# Altium PCB ShareBoard-i.MXRT1050_REV4.PcbDoc (part 1 of 3)
Units mil, origin at the board's own origin, x right, y up, seen from the top; angles counter-clockwise.
Board outline 1968.5 x 1968.5 mil, 4 copper layers (Top Layer, GND, POWER, Bottom Layer), stack 30.635 mil thick; 194 components, 200 nets, 998 pads, 472 vias.
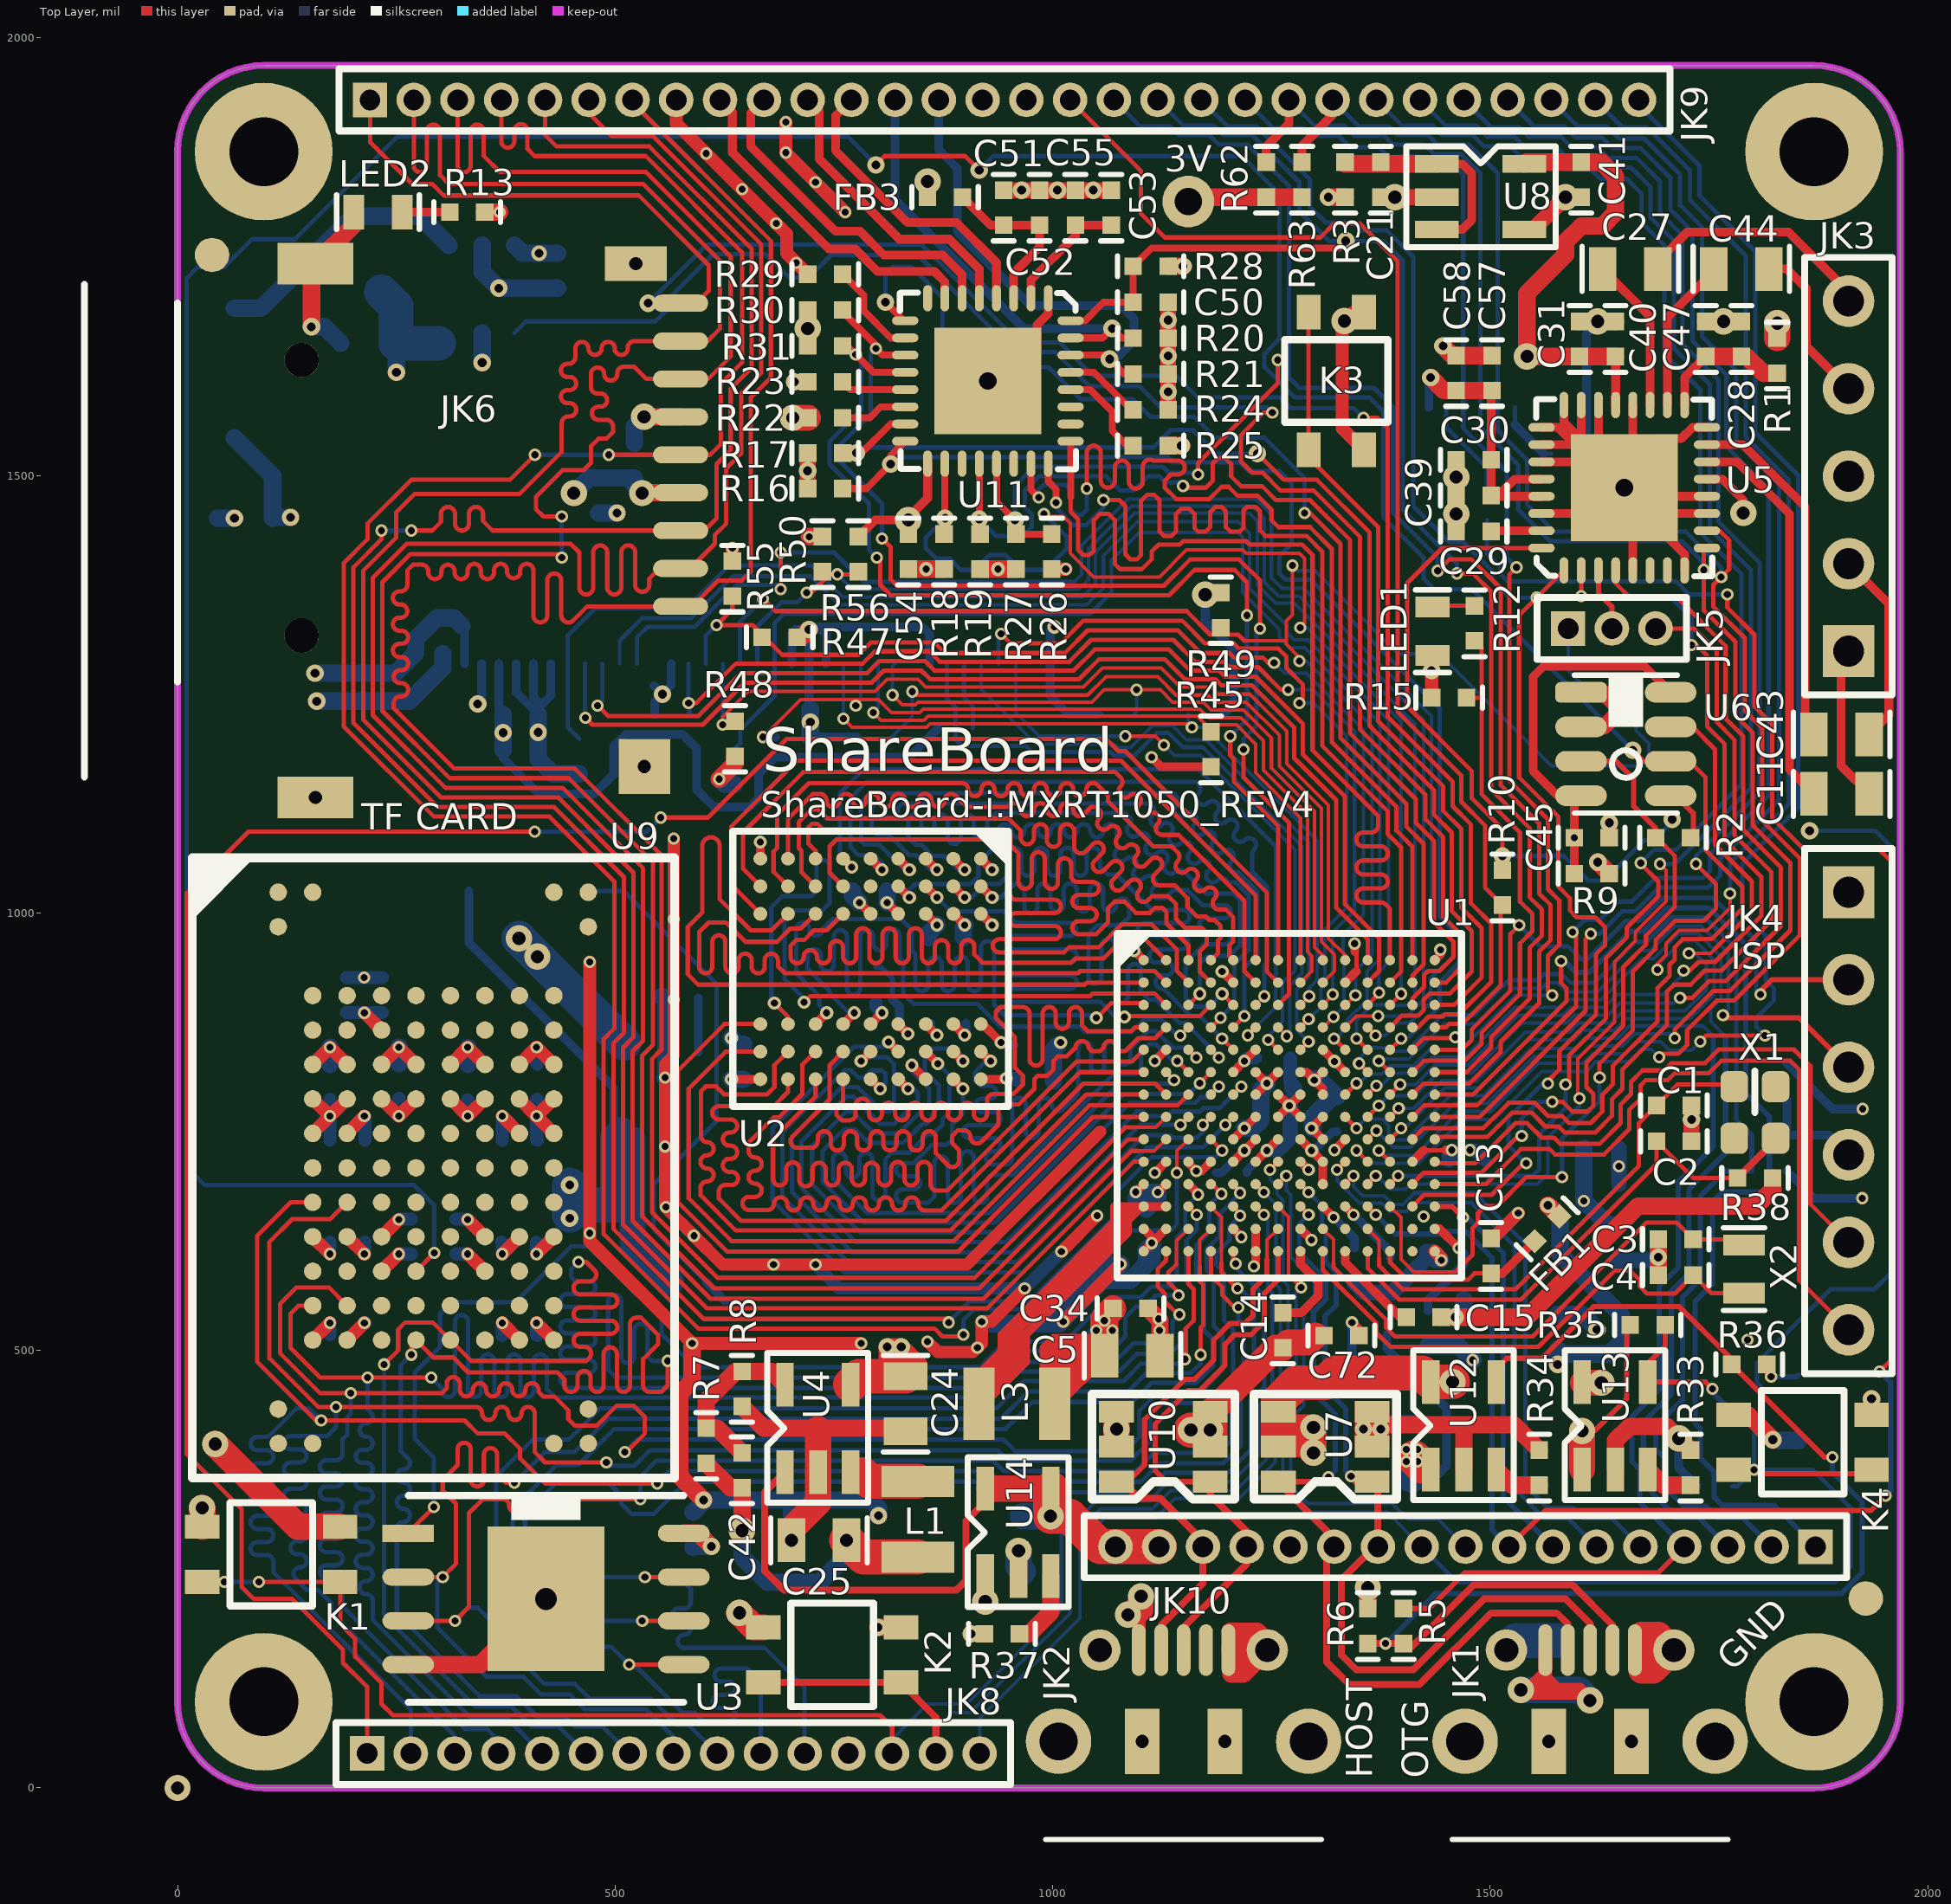
[diagram p0: Top Layer view]
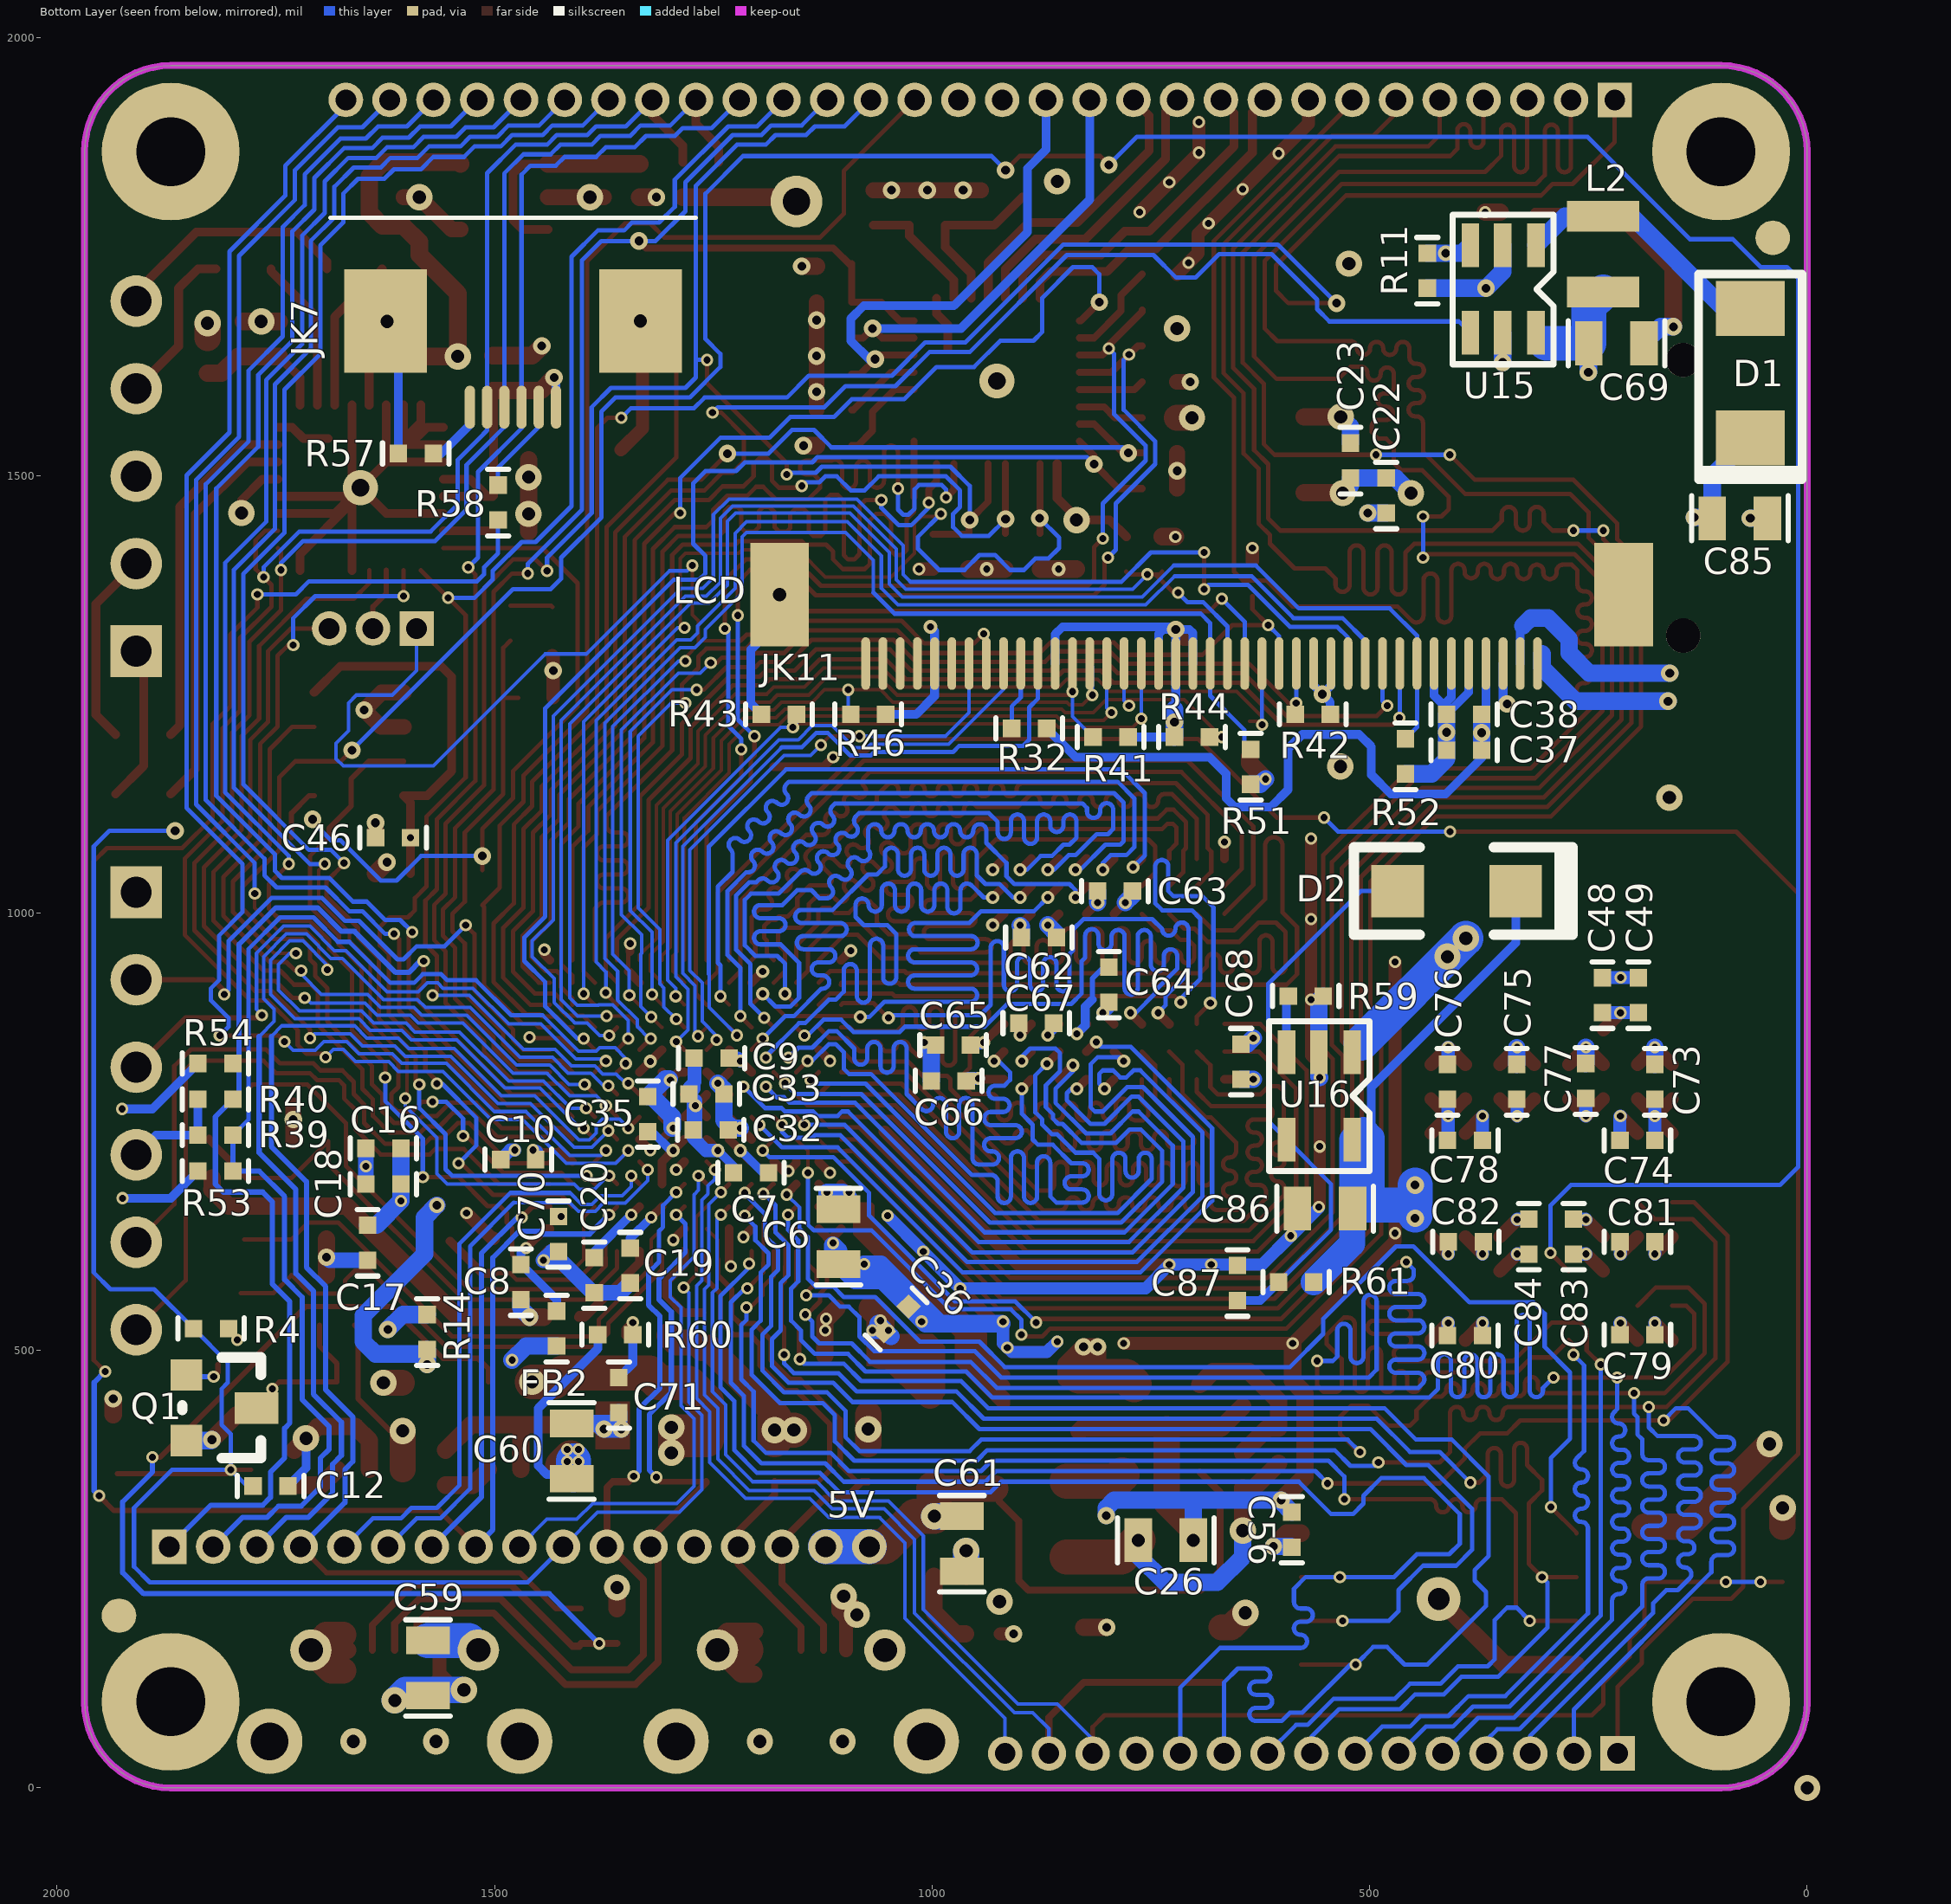
[diagram p1: Bottom Layer view, seen from below]
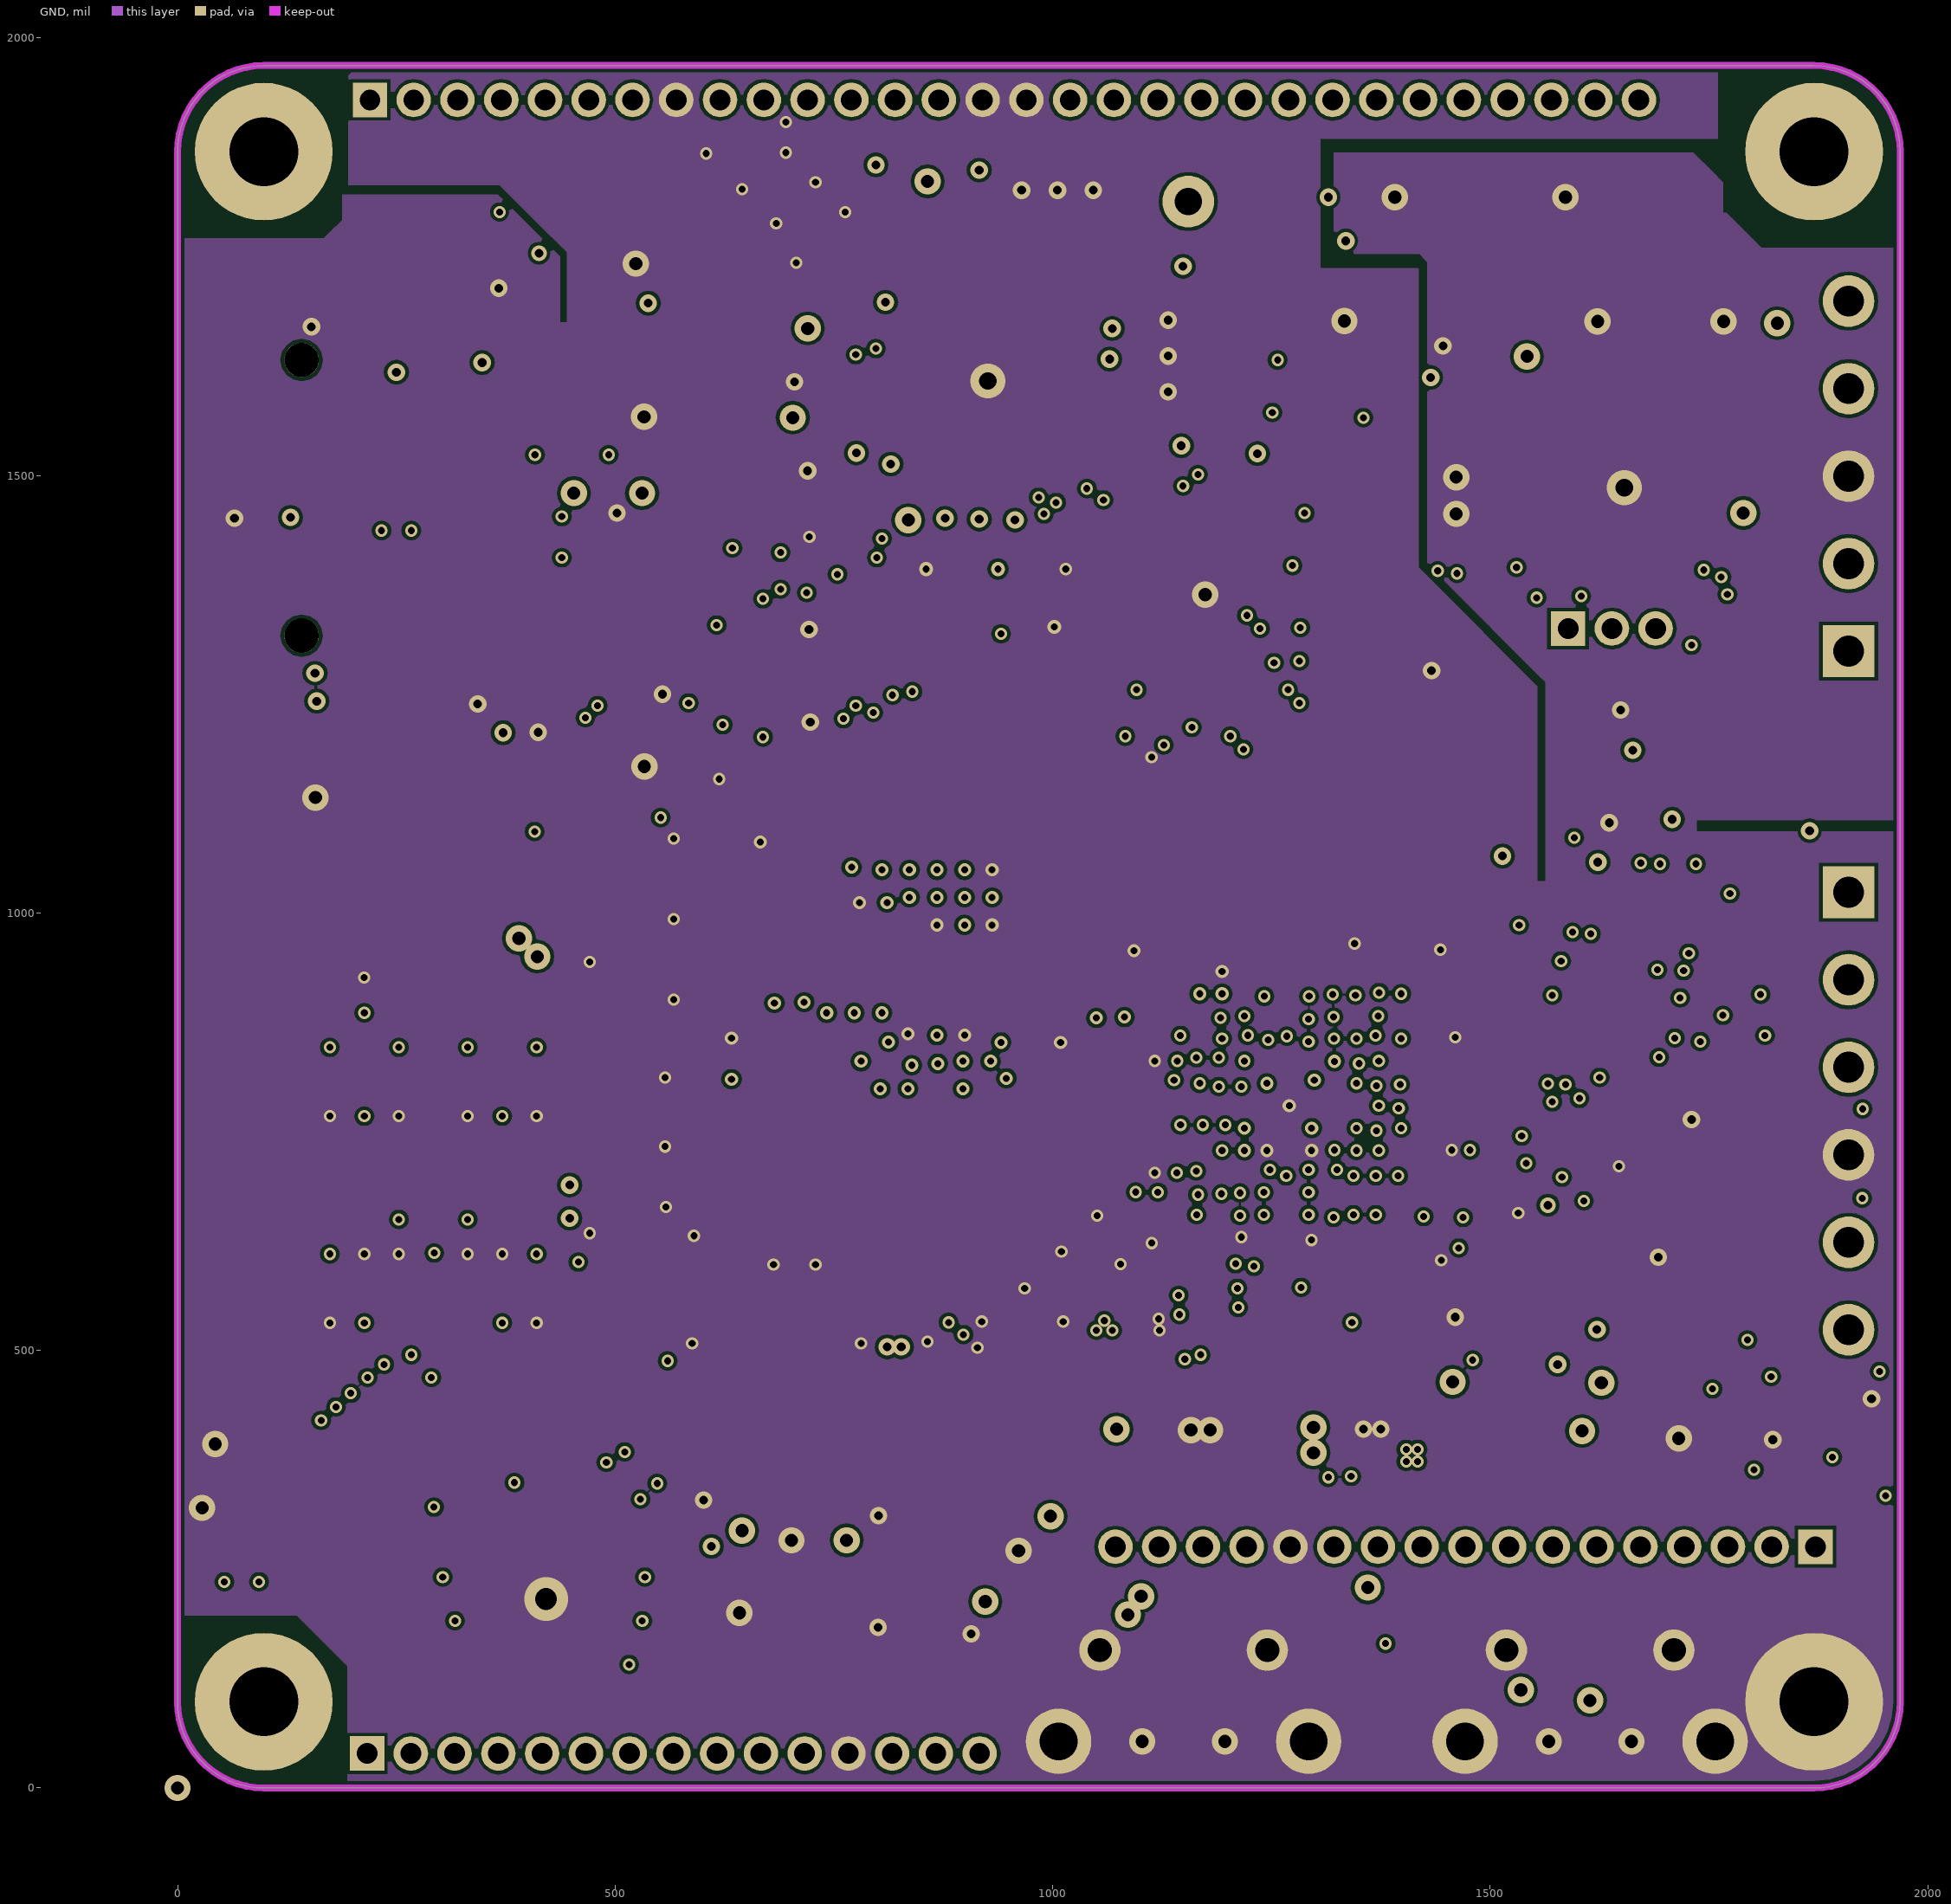
[diagram p2: GND]
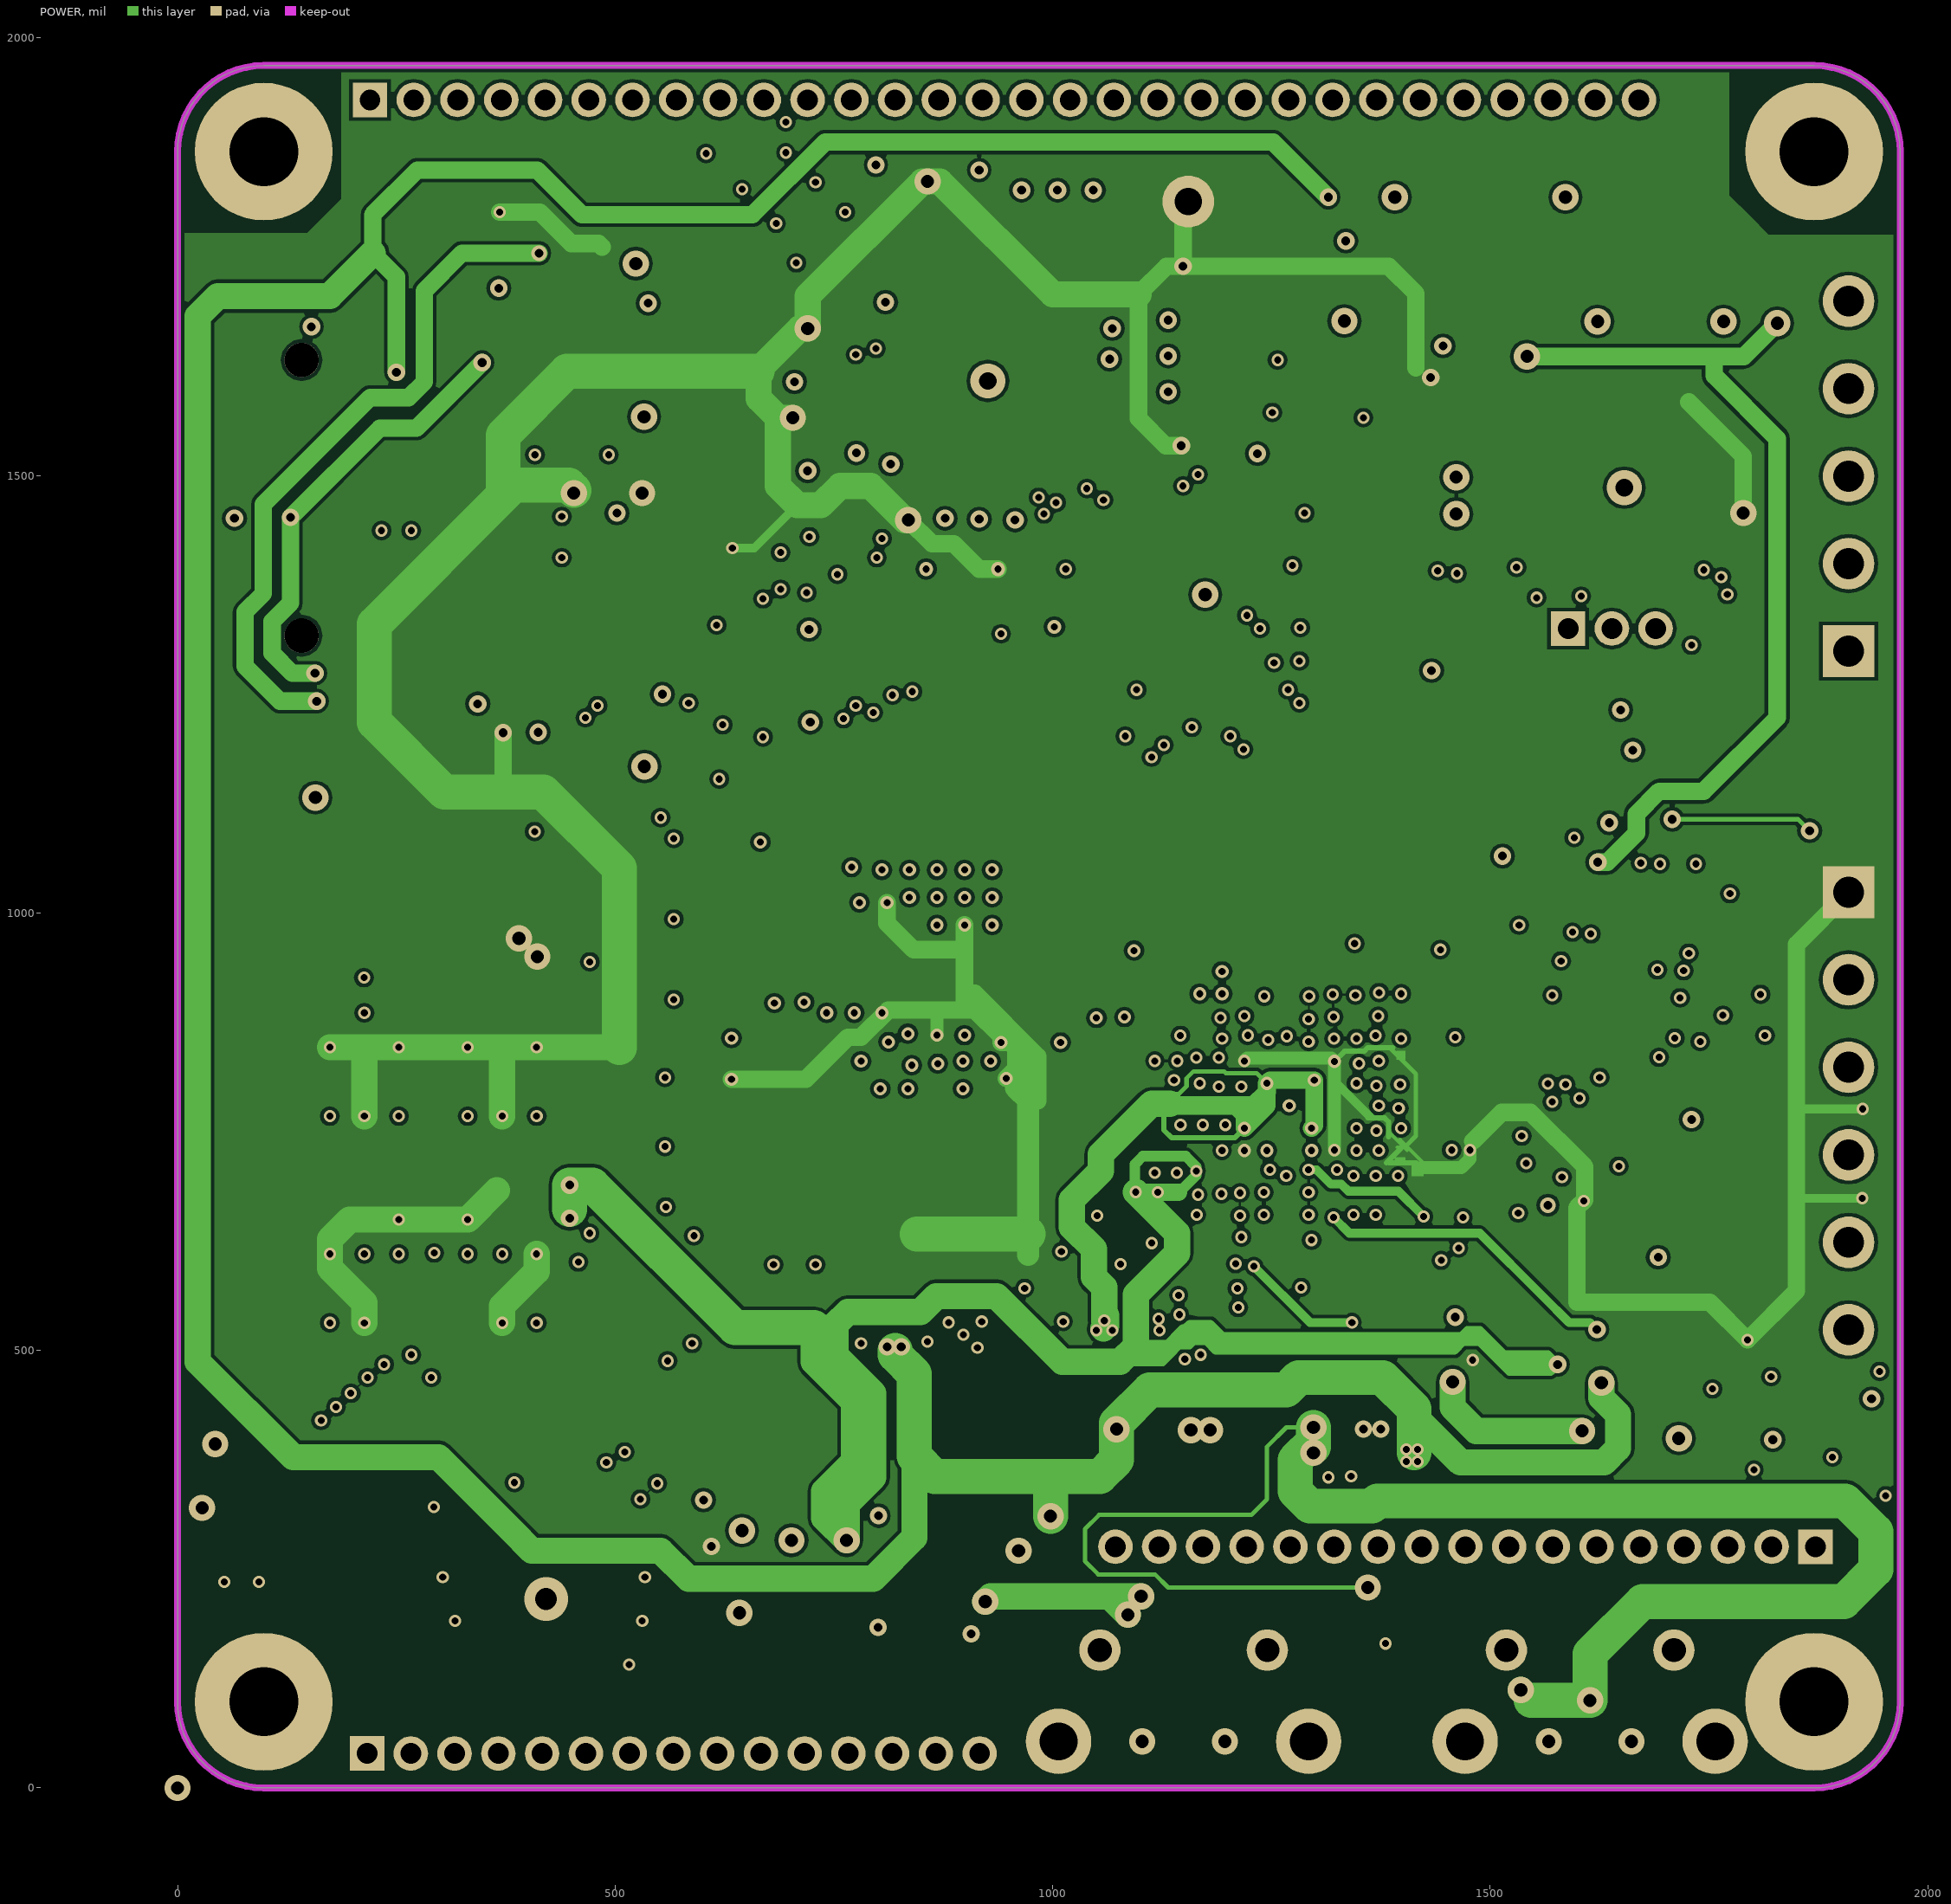
[diagram p3: POWER]

## Layer stack, top to bottom
Top Solder: solder mask 0.4, Solder Resist, Dk 3.5
Top Layer: signal copper 1.4
Dielectric 1: core 10, FR-4, Dk 4.2
GND: signal copper 1.4173
Dielectric 3: prepreg 5, Dk 4.2
POWER: signal copper 1.4173
Dielectric 2: core 10, Dk 4.2
Bottom Layer: signal copper 1.4
Bottom Solder: solder mask 0.4, Solder Resist, Dk 3.5

## Board outline
98.43,0 cw(c98.43,98.43) 0,98.43 0,1870.08 cw(c98.43,1870.08) 98.43,1968.5 1870.08,1968.5 cw(c1870.08,1870.08) 1968.5,1870.08 1968.5,98.43 cw(c1870.08,98.43) 1870.08,0

## Design rules (kind name [scope] priority, off if disabled: settings)
Clearance Polygon [InPolygon] p1: gap=4
Clearance [All] p2: gap=4
PolygonConnect [All] p1: connectstyle=Direct reliefconductorwidth=10 reliefentries=4 polygonreliefangle="90 Angle" airgapwidth=10
RoutingVias [All] p1: holewidth=28 width=50 viastyle="Through Hole" minholewidth=3 minwidth=6 maxholewidth=28 maxwidth=50
SolderMaskExpansion [All] p1: expansion=2
Width [All] p1: maxlimit=100 minlimit=2.6 preferedwidth=10
29 further rules are at their usual default settings.

## Components (designator, comment, footprint, x,y, rotation, side; value= is the part's Value field where it differs from the comment)
C1 "18pF" 402 1710,780 r0 top locked
C2 "18pF" 402 1710,739 r0 top locked
C3 "18pF" 402 1712,627 r180 top locked
C4 "18pF" 402 1712,586 r180 top locked
C5 "47uF/X5R/10V" 805 1091,494 r180 top locked
C6 "47uF/X5R/10V" 805 1107,630 r90 bottom locked
C7 "0.1uF/X7R/16V" 402 1207,703 r0 bottom locked
C8 "10uF/10V/X5R" 402 1470,578 r270 bottom locked
C9 "10uF/10V/X5R" 402 1252,834 r180 bottom locked
C10 "0.1uF/X7R/16V" 402 1473,718 r0 bottom locked
C11 "47uF/X5R/10V" 805 1901.5,1136 r0 top locked
C12 "1uF/16V/X7R" 402 1756,345 r180 bottom locked
C13 "10uF/10V/X5R" 402 1501,608 r90 top locked
C14 "10uF/10V/X5R" 402 1263,523 r270 top locked
C15 "10uF/10V/X5R" 402 1424,538 r0 top locked
C16 "10uF/10V/X5R" 402 1627,731 r0 bottom locked
C17 "0.1uF/X7R/16V" 402 1645,623 r90 bottom locked
C18 "0.1uF/X7R/16V" 402 1627,690 r180 bottom locked
C19 "1uF/16V/X7R" 402 1345,597 r90 bottom locked
C20 "1uF/16V/X7R" 402 1386,586 r90 bottom locked
C21 "10uF/10V/X5R" 402 1375,1838 r270 top locked
C22 "10uF/10V/X5R" 402 481,1477 r270 bottom locked
C23 "0.1uF/X7R/16V" 402 522,1517 r90 bottom locked
C24 "47uF/X5R/10V" 805 832,439 r90 top locked
C25 "47uF/X5R/10V" 805 733,283 r0 top locked
C26 "47uF/X5R/10V" 805 733,283 r0 bottom locked
C27 "47uF/X5R/10V" 805 1660,1736 r0 top locked
C28 "10uF/10V/X5R" 402 1787.16,1656 r90 top locked
C29 "1uF/16V/X7R" 402 1481.16,1436 r180 top locked
C30 "10uF/10V/X5R" 402 1481.16,1518 r0 top locked
C31 "10uF/10V/X5R" 402 1602.16,1656 r90 top locked
C32 "0.1uF/X7R/16V" 402 1253,752 r180 bottom locked
C33 "0.1uF/X7R/16V" 402 1258,793 r180 bottom locked
C34 "0.1uF/X7R/16V" 402 1089,548 r180 top locked
C35 "0.1uF/X7R/16V" 402 1325,770 r90 bottom locked
C36 "10uF/10V/X5R" 402 1041,536 r315 bottom locked
C37 "10uF/10V/X5R" 402 392,1186 r0 bottom locked
C38 "0.1uF/X7R/16V" 402 392,1227 r180 bottom locked
C39 "0.1uF/X7R/16V" 402 1481.16,1477 r180 top locked
C40 "0.1uF/X7R/16V" 402 1643.16,1656 r270 top locked
C41 "10uF/10V/X5R" 402 1604,1838 r270 top locked
C42 "10pF/NP0" 402 645,363 r270 top locked
C43 "47uF/X5R/10V" 805 1901.5,1204 r0 top locked
C44 "47uF/X5R/10V" 805 1787,1736 r0 top locked
C45 "0.1uF/X7R/16V" 402 1616,1086 r0 top locked
C46 "10uF/10V/X5R" 402 1616,1086 r0 bottom locked
C47 "0.1uF/X7R/16V" 402 1746.16,1656 r90 top locked
C48 "10uF/10V/X5R" 402 233.95,906 r90 bottom locked
C49 "0.1uF/X7R/16V" 402 192.95,906 r90 bottom locked
C50 "0.1uF/X7R/16V" 402 1112,1698 r0 top locked
C51 "10uF/10V/X5R" 402 944,1806 r270 top locked
C52 "0.1uF/X7R/16V" 402 985,1806 r270 top locked
C53 "10uF/10V/X5R" 402 1067,1806 r90 top locked
C54 "0.1uF/X7R/16V" 402 835,1413 r270 top locked
C55 "0.1uF/X7R/16V" 402 1026,1806 r90 top locked
C56 "0.1uF/X7R/16V" 402 589,295 r90 bottom locked
C57 "10uF/10V/X5R" 402 1502,1617 r90 top locked
C58 "0.1uF/X7R/16V" 402 1461,1617 r270 top locked
C59 "47uF/X5R/10V" 805 1576,137 r270 bottom locked
C60 "47uF/X5R/10V" 805 1412,385 r270 bottom locked
C61 "47uF/X5R/10V" 805 966,279 r270 bottom locked
C62 "0.1uF/X7R/16V" 402 878,972 r0 bottom locked
C63 "0.1uF/X7R/16V" 402 791,1025 r0 bottom locked
C64 "0.1uF/X7R/16V" 402 798,918 r270 bottom locked
C65 "0.1uF/X7R/16V" 402 976,849 r180 bottom locked
C66 "0.1uF/X7R/16V" 402 981,808 r180 bottom locked
C67 "0.1uF/X7R/16V" 402 881,874 r180 bottom locked
C68 "0.1uF/X7R/16V" 402 647,830 r270 bottom locked
C69 "47uF/X5R/10V" 805 218,1651 r0 bottom locked
C70 "10uF/10V/X5R" 402 1427,633 r90 bottom locked
C71 "10uF/10V/X5R" 402 1358,449 r270 bottom locked
C72 "0.1uF/X7R/16V" 402 1330,517 r0 top locked
C73 "0.1uF/X7R/16V" 402 174,807 r270 bottom locked
C74 "0.1uF/X7R/16V" 402 253,808 r270 bottom locked
C75 "0.1uF/X7R/16V" 402 332,807 r90 bottom locked
C76 "0.1uF/X7R/16V" 402 411,807 r90 bottom locked
C77 "0.1uF/X7R/16V" 402 194,740 r0 bottom locked
C78 "0.1uF/X7R/16V" 402 391,740 r180 bottom locked
C79 "0.1uF/X7R/16V" 402 194,518 r180 bottom locked
C80 "0.1uF/X7R/16V" 402 391,517 r180 bottom locked
C81 "0.1uF/X7R/16V" 402 194,624 r180 bottom locked
C82 "0.1uF/X7R/16V" 402 390,624 r0 bottom locked
C83 "0.1uF/X7R/16V" 402 267,630 r90 bottom locked
C84 "0.1uF/X7R/16V" 402 318,630 r90 bottom locked
C85 "47uF/X5R/10V" 805 77,1451 r0 bottom locked
C86 "47uF/X5R/10V" 805 551,662 r0 bottom locked
C87 "1uF/16V/X7R" 402 651,577 r90 bottom locked
D1 "SS14" SMA 65,1690 r0 bottom locked
D2 "1N4148T/空焊" 1N4148T 468,1025 r180 bottom locked
FB1 "0" 402 1565,639 r45 top locked
FB2 "300" 402 1429,525 r270 bottom locked
FB3 "300" 402 877,1818 r180 top locked
JK1 "OTG" "MICRO USB DIP" 1614.17,157.48 r180 top locked
JK2 "HOST" "MICRO USB DIP" 1149.61,157.48 r180 top locked
JK3 "AOUT" HDR1X5 1909.45,1299.21 r90 top locked
JK4 "ISP" HDR1X6 1909.45,1023.62 r270 top locked
JK5 "I2S" MHDR1X3 1589,1325 r0 top locked
JK6 "TF CARD" "TF CARD-H" 141.73,1437.01 r270 top locked
JK7 "TP" FPC6-0.5 1479,1578 r0 bottom locked
JK8 "E_IO2" MHDR1X15 216.54,39.37 r0 top locked
JK9 "E_IO1" MHDR1X30 944.88,1929.13 r0 top locked
JK10 "E_IO3" MHDR1X17 1871.65,275.59 r180 top locked
JK11 "LCD" FPC40-0.5 692,1285 r180 bottom locked
K1 "O" 3X3.5X1.8轻触开关 107,267 r180 top locked
K2 "+" 3X3.5X1.8轻触开关 748,152 r180 top locked
K3 "-" 3X3.5X1.8轻触开关 1324,1608 r90 top locked
K4 "KEY_RESET" 3X3.5X1.8轻触开关 1857,395 r180 top locked
L1 "SPH252012H2R2MT" 电感2520 846,307 r270 top locked
L2 "SPH252012H100MT" 电感2520 233,1753 r90 bottom locked
L3 "SPH252012H4R7MT" 电感2520 959,439 r0 top locked
LED1 "LED1" 603 1434,1322 r270 top locked
LED2 "POWER ON" 603 229,1801 r180 top locked
Q1 "SS9014" SOT-23 1852,472 r270 bottom locked
R1 "10" 402 1828,1637 r90 top locked
R2 "0" 402 1709,1086 r0 top locked
R3 "10" 402 1334,1838 r90 top locked
R4 "47K" 402 1824,525 r180 bottom locked
R5 "0/For NXP EVK" 402 1401,185 r270 top locked
R6 "10K" 402 1360,185 r90 top locked
R7 "249K" 402 604,391 r90 top locked
R8 "62K" 402 645,456 r270 top locked
R9 "10" 402 1616,1045 r0 top locked
R10 "0" 402 1514,1029 r270 top locked
R11 "10" 402 434,1734 r90 bottom locked
R12 "820" 402 1482,1331 r270 top locked
R13 "820" 402 331,1801 r0 top locked
R14 "0" 402 1577,521 r270 bottom locked
R15 "10K" 402 1453,1246 r0 top locked
R16 "1K" 402 740,1485 r0 top locked
R17 "1K" 402 740.09,1525.68 r0 top locked
R18 "1K" 402 876,1413 r90 top locked
R19 "4.7K" 402 917,1413 r90 top locked
R20 "1K" 402 1112,1657 r0 top locked
R21 "1K" 402 1112,1616 r0 top locked
R22 "4.7K" 402 740,1566 r0 top locked
R23 "1K" 402 740,1607 r0 top locked
R24 "1K" 402 1112,1575 r0 top locked
R25 "4.7K" 402 1112,1534 r0 top locked
R26 "1K" 402 999,1413 r90 top locked
R27 "1K" 402 958,1413 r90 top locked
R28 "10K" 402 1112,1739 r180 top locked
R29 "6.49K" 402 740,1730 r0 top locked
R30 "1K" 402 740,1689 r0 top locked
R31 "1K" 402 740,1648 r0 top locked
R32 "10K" 402 889,1211 r180 bottom locked
R33 "6.8K for 1A" 402 1729,366 r90 top locked
R34 "6.8K for 1A" 402 1556,366 r90 top locked
R35 "10K" 402 1680,529 r180 top locked
R36 "10K" 402 1796,484 r180 top locked
R37 "10K" 402 942,176 r180 top locked
R38 "2.2M" 402 1802.56,697 r0 top locked
R39 "10K" 402 1819,746 r0 bottom locked
R40 "空焊" 402 1819,787 r0 bottom locked
R41 "10K" 402 796,1201 r0 bottom locked
R42 "10K" 402 565,1227 r0 bottom locked
R43 "10K" 402 1175,1227 r180 bottom locked
R44 "10K" 402 703,1201 r180 bottom locked
R45 "10K" 402 1181,1187 r90 top locked
R46 "10K" 402 1073,1227 r0 bottom locked
R47 "10K" 402 688,1315 r180 top locked
R48 "10K" 402 637,1199 r90 top locked
R49 "10K" 402 1192,1346 r270 top locked
R50 "10K" 402 737,1410 r270 top locked
R51 "10K" 402 636,1167 r90 bottom locked
R52 "10K" 402 459,1179 r90 bottom locked
R53 "空焊" 402 1819,705 r0 bottom locked
R54 "10K" 402 1819,828 r0 bottom locked
R55 "空焊" 402 634,1382 r90 top locked
R56 "空焊" 402 778,1410 r90 top locked
R57 "0" 402 1590,1525 r0 bottom locked
R58 "0" 402 1496,1469 r270 bottom locked
R59 "10K" 402 573,905 r180 bottom locked
R60 "10" 402 1362,518 r180 bottom locked
R61 "47K" 402 584,578 r0 bottom locked
R62 "4.7K" 402 1244,1838 r90 top locked
R63 "4.7K" 402 1285,1838 r90 top locked
U1 "RT1052" MAPBGA196-10x10-0.65 1104,946 r0 top locked
U2 "W9825G6JB-6" TFBGA54 792,936 r270 top locked
U3 "25Q256FVEIM" WSON8-6X8 421,216 r0 top locked
U4 "RT8059" SOT-23-5 694,361 r0 top locked
U5 "AK4452" QFN32-5x5-0.5 1653.16,1486 r90 top locked
U6 "MSM26S4030H0" LGA8-4X3-1 1655,1193 r0 top locked
U7 "NUP2114U" TSOP-6 1365,350 r90 top locked
U8 "LP5907MF-3.3" SOT-23-5 1439,1856 r270 top locked
U9 "EMMC" LBGA100-1.0 115,1023.62 r0 top locked
U10 "NUP2114U" TSOP-6 1180,350 r90 top locked
U11 "KSZ8081RNB" QFN32-5x5-0.5 926,1608 r270 top locked
U12 "MT9700" SOT-23-5 1432,364 r0 top locked
U13 "MT9700" SOT-23-5 1605,364 r0 top locked
U14 "MT9700" SOT-23-5 923,242 r0 top locked
U15 "SGM3732" SOT-23-6 310,1763 r0 bottom locked
U16 "MT9700" SOT-23-5 520,841 r0 bottom locked
X1 "24MHz" CY2016 1802.56,772 r270 top locked
X2 "32.768KHz" CY2012 1790,593 r270 top locked

## Footprints (in the part's own frame and the unit in brackets; to place one, negate y for a bottom-side part, rotate by r counter-clockwise, add the part's x,y. Pads: shape width x height; smd on the part's side, far side on the other; paste and mask are expansions set on the pad)
1N4148T [mil]
  rect 60x60 smd: 1(0,0) 2(135,0)
  silkscreen extent -50,-50 200,50
3X3.5X1.8轻触开关 [mm]
  rect 1x0.7 smd: 1(-2,-0.8) 2(2,0.8) 3(2,-0.8) 4(-2,0.8)
  silkscreen extent -1.2,-1.5 1.2,1.5
402 [mil]
  rect 20x20 smd: 1(-20,0) 2(20,0)
  silkscreen extent -38,-12 38,12
603 [mm]
  rect 0.6x1 smd: 1(-0.7,0) 2(0.7,0)
  silkscreen extent -1.2,-0.5 1.2,0.5
805 [mm]
  rect 0.8x1.27 smd: 1(-0.8,0) 2(0.8,0)
  silkscreen extent -1.4,-0.65 1.4,0.65
CY2012 [mm]
  rect 0.6x1.2 smd: 1(-0.7,0) 2(0.7,0)
  silkscreen extent -1.2,-0.6 1.2,0.6
CY2016 [mm] "CRYSTAL"
  rrect50% 0.9x0.8 smd: 0(-0.75,0.6) 0(0.75,-0.6) 1(-0.75,-0.6) 2(0.75,0.6)
  silkscreen extent -1.2,0 0,0
FPC6-0.5 [mm]
  rect 2.4x3 smd: 0(-3.7,-2.5) 0(3.7,-2.5)
  oval 0.3x1.25 smd: 1(-1.25,0) 2(-0.75,0) 3(-0.25,0) 4(0.25,0) 5(0.75,0) 6(1.25,0)
  silkscreen extent -5.3,-5.5 5.3,-5.5
FPC40-0.5 [mil]
  oval 10x60 smd: 1(-383.86,0) 2(-364.17,0) 3(-344.49,0) 4(-324.8,0) 5(-305.12,0) 6(-285.43,0) 7(-265.75,0) 8(-246.06,0) 9(-226.38,0) 10(-206.69,0) 11(-187.01,0) 12(-167.32,0) 13(-147.64,0) 14(-127.95,0) 15(-108.27,0) 16(-88.58,0) 17(-68.9,0) 18(-49.21,0) 19(-29.53,0) 20(-9.84,0) 21(9.84,0) 22(29.53,0) 23(49.21,0) 24(68.9,0) 25(88.58,0) 26(108.27,0) 27(127.95,0) 28(147.64,0) 29(167.32,0) 30(187.01,0) 31(206.69,0) 32(226.38,0) 33(246.06,0) 34(265.75,0) 35(285.43,0) 36(305.12,0) 37(324.8,0) 38(344.49,0) 39(364.17,0) 40(383.86,0)
  rect 66.93x118.11 smd: ""(-482.28,78.74) ""(482.28,78.74)
HDR1X5 [mm] "Connector; Header; 5 Position"
  rect 1.5x1.5 hole 0.9: 1(0,0)
  round 1.5 hole 0.9: 2(2.54,0) 3(5.08,0) 4(7.62,0) 5(10.16,0)
  silkscreen extent -1.27,-1.27 11.43,1.27
HDR1X6 [mm] "Connector; Header; 6 Position"
  rect 1.5x1.5 hole 0.9: 1(0,0)
  round 1.5 hole 0.9: 2(2.54,0) 3(5.08,0) 4(7.62,0) 5(10.16,0) 6(12.7,0)
  silkscreen extent -1.27,-1.27 13.97,1.27
LBGA100-1.0 [mil]
  round 20 smd: A1(0,0) A2(39.37,0) A9(314.96,0) A10(354.33,0) B1(0,-39.37) B10(354.33,-39.37) D2(39.37,-118.11) D3(78.74,-118.11) D4(118.11,-118.11) D5(157.48,-118.11) D6(196.85,-118.11) D7(236.22,-118.11) D8(275.59,-118.11) D9(314.96,-118.11) E2(39.37,-157.48) E3(78.74,-157.48) E4(118.11,-157.48) E5(157.48,-157.48) E6(196.85,-157.48) E7(236.22,-157.48) E8(275.59,-157.48) E9(314.96,-157.48) F2(39.37,-196.85) F3(78.74,-196.85) F4(118.11,-196.85) F5(157.48,-196.85) F6(196.85,-196.85) F7(236.22,-196.85) F8(275.59,-196.85) F9(314.96,-196.85) G2(39.37,-236.22) G3(78.74,-236.22) G4(118.11,-236.22) G5(157.48,-236.22) G6(196.85,-236.22) G7(236.22,-236.22) G8(275.59,-236.22) G9(314.96,-236.22) H2(39.37,-275.59) H3(78.74,-275.59) H4(118.11,-275.59) H5(157.48,-275.59) H6(196.85,-275.59) H7(236.22,-275.59) H8(275.59,-275.59) H9(314.96,-275.59) J2(39.37,-314.96) J3(78.74,-314.96) J4(118.11,-314.96) J5(157.48,-314.96) J6(196.85,-314.96) J7(236.22,-314.96) J8(275.59,-314.96) J9(314.96,-314.96) K2(39.37,-354.33) K3(78.74,-354.33) K4(118.11,-354.33) K5(157.48,-354.33) K6(196.85,-354.33) K7(236.22,-354.33) K8(275.59,-354.33) K9(314.96,-354.33) L2(39.37,-393.7) L3(78.74,-393.7) L4(118.11,-393.7) L5(157.48,-393.7) L6(196.85,-393.7) L7(236.22,-393.7) L8(275.59,-393.7) L9(314.96,-393.7) M2(39.37,-433.07) M3(78.74,-433.07) M4(118.11,-433.07) M5(157.48,-433.07) M6(196.85,-433.07) M7(236.22,-433.07) M8(275.59,-433.07) M9(314.96,-433.07) N2(39.37,-472.44) N3(78.74,-472.44) N4(118.11,-472.44) N5(157.48,-472.44) N6(196.85,-472.44) N7(236.22,-472.44) N8(275.59,-472.44) N9(314.96,-472.44) P2(39.37,-511.81) P3(78.74,-511.81) P4(118.11,-511.81) P5(157.48,-511.81) P6(196.85,-511.81) P7(236.22,-511.81) P8(275.59,-511.81) P9(314.96,-511.81) T1(0,-590.55) T10(354.33,-590.55) U1(0,-629.92) U2(39.37,-629.92) U9(314.96,-629.92) U10(354.33,-629.92)
  silkscreen extent -102,-669 453,41
LGA8-4X3-1 [mm]
  rrect50% 1.5x0.6 smd: 1(-1.3,1.5)
  oval 1.5x0.6 smd: 2(-1.3,0.5) 3(-1.3,-0.5) 4(-1.3,-1.5) 5(1.3,-1.5) 6(1.3,-0.5) 7(1.3,0.5) 8(1.3,1.5)
  silkscreen extent -1.5,-2 1.5,2
MAPBGA196-10x10-0.65 [mm]
  round 0.3 smd: A1(0,0) A2(0.65,0) A3(1.3,0) A4(1.95,0) A5(2.6,0) A6(3.25,0) A7(3.9,0) A8(4.55,0) A9(5.2,0) A10(5.85,0) A11(6.5,0) A12(7.15,0) A13(7.8,0) A14(8.45,0) B1(0,-0.65) B2(0.65,-0.65) B3(1.3,-0.65) B4(1.95,-0.65) B5(2.6,-0.65) B6(3.25,-0.65) B7(3.9,-0.65) B8(4.55,-0.65) B9(5.2,-0.65) B10(5.85,-0.65) B11(6.5,-0.65) B12(7.15,-0.65) B13(7.8,-0.65) B14(8.45,-0.65) C1(0,-1.3) C2(0.65,-1.3) C3(1.3,-1.3) C4(1.95,-1.3) C5(2.6,-1.3) C6(3.25,-1.3) C7(3.9,-1.3) C8(4.55,-1.3) C9(5.2,-1.3) C10(5.85,-1.3) C11(6.5,-1.3) C12(7.15,-1.3) C13(7.8,-1.3) C14(8.45,-1.3) D1(0,-1.95) D2(0.65,-1.95) D3(1.3,-1.95) D4(1.95,-1.95) D5(2.6,-1.95) D6(3.25,-1.95) D7(3.9,-1.95) D8(4.55,-1.95) D9(5.2,-1.95) D10(5.85,-1.95) D11(6.5,-1.95) D12(7.15,-1.95) D13(7.8,-1.95) D14(8.45,-1.95) E1(0,-2.6) E2(0.65,-2.6) E3(1.3,-2.6) E4(1.95,-2.6) E5(2.6,-2.6) E6(3.25,-2.6) E7(3.9,-2.6) E8(4.55,-2.6) E9(5.2,-2.6) E10(5.85,-2.6) E11(6.5,-2.6) E12(7.15,-2.6) E13(7.8,-2.6) E14(8.45,-2.6) F1(0,-3.25) F2(0.65,-3.25) F3(1.3,-3.25) F4(1.95,-3.25) F5(2.6,-3.25) F6(3.25,-3.25) F7(3.9,-3.25) F8(4.55,-3.25) F9(5.2,-3.25) F10(5.85,-3.25) F11(6.5,-3.25) F12(7.15,-3.25) F13(7.8,-3.25) F14(8.45,-3.25) G1(0,-3.9) G2(0.65,-3.9) G3(1.3,-3.9) G4(1.95,-3.9) G5(2.6,-3.9) G6(3.25,-3.9) G7(3.9,-3.9) G8(4.55,-3.9) G9(5.2,-3.9) G10(5.85,-3.9) G11(6.5,-3.9) G12(7.15,-3.9) G13(7.8,-3.9) G14(8.45,-3.9) H1(0,-4.55) H2(0.65,-4.55) H3(1.3,-4.55) H4(1.95,-4.55) H5(2.6,-4.55) H6(3.25,-4.55) H7(3.9,-4.55) H8(4.55,-4.55) H9(5.2,-4.55) H10(5.85,-4.55) H11(6.5,-4.55) H12(7.15,-4.55) H13(7.8,-4.55) H14(8.45,-4.55) J1(0,-5.2) J2(0.65,-5.2) J3(1.3,-5.2) J4(1.95,-5.2) J5(2.6,-5.2) J6(3.25,-5.2) J7(3.9,-5.2) J8(4.55,-5.2) J9(5.2,-5.2) J10(5.85,-5.2) J11(6.5,-5.2) J12(7.15,-5.2) J13(7.8,-5.2) J14(8.45,-5.2) K1(0,-5.85) K2(0.65,-5.85) K3(1.3,-5.85) K4(1.95,-5.85) K5(2.6,-5.85) K6(3.25,-5.85) K7(3.9,-5.85) K8(4.55,-5.85) K9(5.2,-5.85) K10(5.85,-5.85) K11(6.5,-5.85) K12(7.15,-5.85) K13(7.8,-5.85) K14(8.45,-5.85) L1(0,-6.5) L2(0.65,-6.5) L3(1.3,-6.5) L4(1.95,-6.5) L5(2.6,-6.5) L6(3.25,-6.5) L7(3.9,-6.5) L8(4.55,-6.5) L9(5.2,-6.5) L10(5.85,-6.5) L11(6.5,-6.5) L12(7.15,-6.5) L13(7.8,-6.5) L14(8.45,-6.5) M1(0,-7.15) M2(0.65,-7.15) M3(1.3,-7.15) M4(1.95,-7.15) M5(2.6,-7.15) M6(3.25,-7.15) M7(3.9,-7.15) M8(4.55,-7.15) M9(5.2,-7.15) M10(5.85,-7.15) M11(6.5,-7.15) M12(7.15,-7.15) M13(7.8,-7.15) M14(8.45,-7.15) N1(0,-7.8) N2(0.65,-7.8) N3(1.3,-7.8) N4(1.95,-7.8) N5(2.6,-7.8) N6(3.25,-7.8) N7(3.9,-7.8) N8(4.55,-7.8) N9(5.2,-7.8) N10(5.85,-7.8) N11(6.5,-7.8) N12(7.15,-7.8) N13(7.8,-7.8) N14(8.45,-7.8) P1(0,-8.45) P2(0.65,-8.45) P3(1.3,-8.45) P4(1.95,-8.45) P5(2.6,-8.45) P6(3.25,-8.45) P7(3.9,-8.45) P8(4.55,-8.45) P9(5.2,-8.45) P10(5.85,-8.45) P11(6.5,-8.45) P12(7.15,-8.45) P13(7.8,-8.45) P14(8.45,-8.45)
  silkscreen extent -0.77,-9.23 9.23,0.78
MHDR1X3 [mm] "Connector; Header; 3 Position"
  rect 1x1 hole 0.6: 1(0,0)
  round 1 hole 0.6: 2(1.27,0) 3(2.54,0)
  silkscreen extent -0.9,-0.9 3.44,0.9
MHDR1X15 [mm] "Connector; Header; 15 Position"
  rect 1x1 hole 0.6: 1(0,0)
  round 1 hole 0.6: 2(1.27,0) 3(2.54,0) 4(3.81,0) 5(5.08,0) 6(6.35,0) 7(7.62,0) 8(8.89,0) 9(10.16,0) 10(11.43,0) 11(12.7,0) 12(13.97,0) 13(15.24,0) 14(16.51,0) 15(17.78,0)
  silkscreen extent -0.9,-0.9 18.68,0.9
MHDR1X17 [mm] "Connector; Header; 17 Position"
  rect 1x1 hole 0.6: 1(0,0)
  round 1 hole 0.6: 2(1.27,0) 3(2.54,0) 4(3.81,0) 5(5.08,0) 6(6.35,0) 7(7.62,0) 8(8.89,0) 9(10.16,0) 10(11.43,0) 11(12.7,0) 12(13.97,0) 13(15.24,0) 14(16.51,0) 15(17.78,0) 16(19.05,0) 17(20.32,0)
  silkscreen extent -0.9,-0.9 21.22,0.9
MHDR1X30 [mm]
  rect 1x1 hole 0.6: 1(-18.415,0)
  round 1 hole 0.6: 2(-17.145,0) 3(-15.875,0) 4(-14.605,0) 5(-13.335,0) 6(-12.065,0) 7(-10.795,0) 8(-9.525,0) 9(-8.255,0) 10(-6.985,0) 11(-5.715,0) 12(-4.445,0) 13(-3.175,0) 14(-1.905,0) 15(-0.635,0) 16(0.635,0) 17(1.905,0) 18(3.175,0) 19(4.445,0) 20(5.715,0) 21(6.985,0) 22(8.255,0) 23(9.525,0) 24(10.795,0) 25(12.065,0) 26(13.335,0) 27(14.605,0) 28(15.875,0) 29(17.145,0) 30(18.415,0)
  silkscreen extent -19.32,-0.9 19.32,0.9
"MICRO USB DIP" [mm]
  round 1.9 hole 1.1: 0(-3.63,2.65) 0(3.63,2.65)
  round 1.2 hole 0.7: 0(-2.43,0) 0(2.43,0)
  rect 1x1.9 smd: 0(-1.2,2.65) 0(1.2,2.65)
  oval 0.4x1.5 smd: 1(1.3,0) 2(0.65,0) 3(0,0) 4(-0.65,0) 5(-1.3,0)
  silkscreen extent -4,5.5 4,5.5
QFN32-5x5-0.5 [mil]
  rect 122.05x122.05 smd: 0(0,0)
  oval 30x10 smd: 1(-94.5,68.92) 2(-94.5,49.23) 3(-94.5,29.53) 4(-94.5,9.85) 5(-94.5,-9.85) 6(-94.5,-29.53) 7(-94.5,-49.22) 8(-94.5,-68.91) 17(94.5,-68.91) 18(94.5,-49.22) 19(94.5,-29.53) 20(94.5,-9.85) 21(94.5,9.85) 22(94.5,29.53) 23(94.5,49.23) 24(94.5,68.91)
  oval 10x30 smd: 9(-68.91,-94.5) 10(-49.23,-94.5) 11(-29.53,-94.5) 12(-9.85,-94.5) 13(9.85,-94.5) 14(29.53,-94.5) 15(49.22,-94.5) 16(68.91,-94.5) 25(68.91,94.5) 26(49.22,94.5) 27(29.53,94.5) 28(9.85,94.5) 29(-9.85,94.5) 30(-29.53,94.5) 31(-49.23,94.5) 32(-68.91,94.5)
  silkscreen extent -101,-100 101,100
SMA [mm]
  rect 2x1.6 smd: 1(0,-0.025) 2(0,3.734)
  silkscreen extent -1.5,-1.02 1.5,5.05
SOT-23 [mil]
  rect 36x36 smd: 1(0,0) 2(75,0)
  rect 36x50 smd: 3(38,80)
  silkscreen extent -20,-5 95,85
SOT-23-5 [mil]
  rect 20x50 smd: 1(0,0) 2(38,0) 3(75,0) 4(75,100) 5(0,100)
  silkscreen extent -20,-35 95,136
SOT-23-6 [mil]
  rect 20x50 smd: 1(0,0) 2(38,0) 3(75,0) 4(75,100) 5(38,100) 6(0,100)
  silkscreen extent -20,-35 95,136
"TF CARD-H" [mm]
  rect 1x1.8 smd: 0(-7.75,9.7)
  rect 1.2x2.2 smd: 0(-7.75,0.4) 0(7.75,0.4)
  rect 1.6x1.5 smd: 0(6.85,9.95)
  oval 0.5x1.6 smd: 1(2.2,11) 2(1.1,11) 3(0,11) 4(-1.1,11) 5(-2.2,11) 6(-3.3,11) 7(-4.4,11) 8(-5.5,11) 9(-6.6,11)
  round 1 hole 1: ""(-4.95,0) ""(3.05,0)
  silkscreen extent -7.15,-6.3 7.15,-3.6
TFBGA54 [mm]
  round 0.4 smd: A1(-3.2,3.2) A2(-2.4,3.2) A3(-1.6,3.2) A7(1.6,3.2) A8(2.4,3.2) A9(3.2,3.2) B1(-3.2,2.4) B2(-2.4,2.4) B3(-1.6,2.4) B7(1.6,2.4) B8(2.4,2.4) B9(3.2,2.4) C1(-3.2,1.6) C2(-2.4,1.6) C3(-1.6,1.6) C7(1.6,1.6) C8(2.4,1.6) C9(3.2,1.6) D1(-3.2,0.8) D2(-2.4,0.8) D3(-1.6,0.8) D7(1.6,0.8) D8(2.4,0.8) D9(3.2,0.8) E1(-3.2,0) E2(-2.4,0) E3(-1.6,0) E7(1.6,0) E8(2.4,0) E9(3.2,0) F1(-3.2,-0.8) F2(-2.4,-0.8) F3(-1.6,-0.8) F7(1.6,-0.8) F8(2.4,-0.8) F9(3.2,-0.8) G1(-3.2,-1.6) G2(-2.4,-1.6) G3(-1.6,-1.6) G7(1.6,-1.6) G8(2.4,-1.6) G9(3.2,-1.6) H1(-3.2,-2.4) H2(-2.4,-2.4) H3(-1.6,-2.4) H7(1.6,-2.4) H8(2.4,-2.4) H9(3.2,-2.4) J1(-3.2,-3.2) J2(-2.4,-3.2) J3(-1.6,-3.2) J7(1.6,-3.2) J8(2.4,-3.2) J9(3.2,-3.2)
  silkscreen extent -4,-4 4,4
TSOP-6 [mil]
  rect 25x40 smd: 1(0,0) 2(40,0) 3(80,0) 4(80,107) 5(40,107) 6(0,107)
  silkscreen extent -20,-28 100,135
WSON8-6X8 [mm]
  rect 3.4x4.2 smd: 0(0,0)
  rect 1.5x0.5 smd: 1(-4,1.905)
  oval 1.5x0.5 smd: 2(-4,0.635) 3(-4,-0.635) 4(-4,-1.905) 5(4,-1.905) 6(4,-0.635) 7(4,0.635) 8(4,1.905)
  silkscreen extent -4,-3 4,3.02
电感2520 [mm] "2A电感2520"
  rect 0.9x2.1 smd: 1(-1.1,0) 2(1.1,0)

## Part data
C1 C2 C3 C4 C5 C6 C7 C8 C9 C10 C11 C12 C13 C14 C15 C16 C17 C18 C19 C20 C21 C22 C23 C24 C25 C26 C27 C28 C29 C30 C31 C32 C33 C34 C35 C36 C37 C38 C39 C40 C41 C42 C43 C44 C45 C46 C47 C48 C49 C50 C51 C52 C53 C54 C55 C56 C57 C58 C59 C60 C61 C62 C63 C64 C65 C66 C67 C68 C69 C70 C71 C72 C73 C74 C75 C76 C77 C78 C79 C80 C81 C82 C83 C84 C85 C86 C87: library part CAP, "Capacitor"
D1 D2: library part DIODE_SCHOTTKY_1
FB1 FB2 FB3 L1 L2 L3: library part INDUCTOR
JK1 JK2: library part "MICRO USB", "MICRO USB"
JK3: library part "Header 5", "Header, 5-Pin"
JK4 JK7: library part "Header 6", "Header, 6-Pin"
JK5: library part MHDR1X3, "Header, 3-Pin"
JK8: library part MHDR1X15, "Header, 15-Pin"
JK9: library part CON30
JK10: library part MHDR1X17, "Header, 17-Pin"
JK11: library part CON40
K1 K2 K3 K4: library part KEY2
LED1 LED2: library part LED-RY-SP150
Q1: library part 9014贴片
R1 R2 R3 R4 R5 R6 R7 R8 R9 R10 R11 R12 R13 R14 R15 R16 R17 R18 R19 R20 R21 R22 R23 R24 R25 R26 R27 R28 R29 R30 R31 R32 R33 R34 R35 R36 R37 R38 R39 R40 R41 R42 R43 R44 R45 R46 R47 R48 R49 R50 R51 R52 R53 R54 R55 R56 R57 R58 R59 R60 R61 R62 R63: library part RES2
U2: library part W9825G6JB, "W9825G6JB"
U3: library part 25Q40, "25Q40"
U8: library part LP5907
U9: library part EMMC-BGA100
X1 X2: library part XTAL_ELLIP

## Free pads (board coordinates)
  round 39.37 smd: ""(39.37,1751.97) ""(1929.13,216.54)
  round 39.37 smd far side: ""(39.37,1771.65) ""(1929.13,196.85)
  round 157.48 hole 78.74: ""(98.43,98.43) ""(98.43,1870.08) ""(1870.08,98.43) ""(1870.08,1870.08)
  round 59.06 hole 31.5: ""(1155,1813)

## Via types
v1: diameter 14, hole 8, Top Layer to Bottom Layer, 293 vias
v2: diameter 20, hole 10, Top Layer to Bottom Layer, 67 vias
v3: diameter 15, hole 8, Top Layer to Bottom Layer, 53 vias
v4: diameter 30, hole 15, Top Layer to Bottom Layer, 51 vias
v5: diameter 16, hole 8, Top Layer to Bottom Layer, 3 vias
v6: diameter 40, hole 20, Top Layer to Bottom Layer, 2 vias
v7: diameter 18, hole 10, Top Layer to Bottom Layer, 2 vias
v8: diameter 50, hole 25, Top Layer to Bottom Layer, 1 vias

## Nets (pads, with @x,y where several pads share a name; then routed paths per layer and width w, separated by ;. In a path a pad name is that pad's centre, name@x,y a point inside that pad or via, vN(x,y) a via of type N, cw(c..) or ccw(c..) an arc to the next point about the centre after c; other vN are vias at no path point)
BL+: C85.2 D1.2 JK11.39 U15.5 | length 930.8
  POWER w20: v2(157,1274) 131,1274 108.05,1296.95 108.05,1333.05 129,1354 v2(129,1452) 231,1554 273,1554 v2(348,1629)
  Bottom Layer w10: 325,1328 327.83,1325.17 JK11.39@327.83,1285
  Bottom Layer w20: D1.2@65,1543 108.5,1499.5 C85.2@108.5,1451 109.5,1452 v2(129,1452) ; v2(157,1274) 249,1274 272,1297 272,1313 296,1337 316,1337 325,1328 ; v2(348,1629) U15.5@348,1663
BL-: JK11.40 R11.2 U15.3 | length 1015.5
  POWER w20: v2(159,1242) 117,1242 77,1282 77,1344 98,1365 98,1467 220,1589 264,1589 282,1607 282,1711 325,1754 v7(413,1754)
  Bottom Layer w20: v2(159,1242) 265,1242 303,1280 303,1296 ; U15.3@385,1763 394,1754 v7(413,1754) R11.2@434,1754
CAN1/KEY/GPIO/ADC4: JK9.27 U1.H13 | length 1601
  Top Layer w5: U1.H13@1411.09,766.87 1424.22,780 1485,780 1598,893 1598,974 v1(1594,978)
  Bottom Layer w5: JK9.27@1519.88,1929.13 1550.02,1899 1585,1899 1598,1886 1628,1886 1640,1874 1672,1874 1706,1840 1706,1804 1731,1779 1731,1654 1770,1615 1770,1533 1818,1485 1818,1134 1751,1067 1751,1048 1743,1040 1689,1040 1662,1013 1646,1013 1625,992 1608,992 v1(1594,978)
CAN1/SAI_MCLK: JK9.20 U1.M13 U5.1 | length 1769.1
  Top Layer w5: U1.M13@1411.09,664.5 1424.27,677.69 1501.69,677.69 1538,714 v1(1541,714) ; v1(1566,805) 1566,808 1579,821 1579,842 1621,884 1621,953 1631,963 1631,984 1620,995 1599,995 1591,1003 1591,1017 1578,1030 1578,1110 1533,1155 1533,1340.26 v1(1553,1360.26) U5.1@1584.24,1391.5
  Bottom Layer w5: JK9.20@1169.88,1929.13 1200.02,1899 1233,1899 1294,1838 1294,1807 1312,1789 1343,1789 1352,1780 1382,1780 1412,1750 1412,1465 1453,1424 1469,1424 1502,1391 1502,1381 1522.74,1360.26 v1(1553,1360.26) ; v1(1541,714) 1521,734 1521,766 1560,805 v1(1566,805)
CAN2/GPIO/ADC0: JK9.28 U1.H14 | length 1546.7
  Top Layer w5: U1.H14@1436.68,766.87 1487.87,766.87 1609,888 1609,970 v1(1615,976)
  Bottom Layer w5: JK9.28@1569.88,1929.13 1600.02,1899 1633,1899 1647,1885 1676,1885 1717,1844 1717,1809 1742,1784 1742,1659 1781,1620 1781,1539 1830,1490 1830,1129 1763,1062 1763,1043 1749,1029 1693,1029 1666,1002 1651,1002 1625,976 v1(1615,976)
CAN2/GPIO/ADC1: JK10.5 U1.L10 | length 696.3
  Top Layer w5: U1.L10@1334.32,690.09 v1(1343.66,699.44)
  Bottom Layer w4: v1(1343.66,699.44) 1343.66,687.34 1354,677 1379,677 1389,667 1400.69,667 1413.69,680 1414,680
  Bottom Layer w5: 1414,680 1482,680 1540,622 1540,346 1566,320 1595,320 1607,308 1639.24,308 JK10.5@1671.65,275.59
ENET_LED0: JK9.14 R21.1 U11.30 | length 545
  Top Layer w8: U11.30@1020.5,1637.53 1060.46,1637.53 v2(1065,1633) 1082,1616 R21.1@1092,1616
  Bottom Layer w10: JK9.14@869.88,1929.13 869.88,1872.12 891,1851 891,1778 975,1694 1078,1694 1093,1679 1093,1654 1072,1633 v2(1065,1633)
ENET_LED1: JK9.13 R20.1 U11.31 | length 503.6
  Top Layer w8: U11.31@1020.5,1657.22 1057.22,1657.22 v2(1068,1668) 1079,1657 R20.1@1092,1657
  Bottom Layer w10: JK9.13@819.88,1929.13 819.88,1815.12 967,1668 v2(1068,1668)
ENET_MDC: R31.2 U1.A7 U11.12 | length 1292.7
  Top Layer w5: v1(799,1406) 803,1402 803,1375 815,1363 1133,1363 1162,1392 1208,1392 1222,1378 v1(1222,1340) ; v1(1203,1202) 1203,1180 1207,1176 1207,1150 1257.54,1099.46 U1.A7@1257.54,946
  Top Layer w8: R31.2@760,1648 765,1648 v1(775,1638) 795.16,1617.85 U11.12@831.5,1617.85
  Bottom Layer w5: v1(775,1638) 781,1632 781,1575 745,1539 745,1513 790,1468 790,1415 v1(799,1406) ; v1(1203,1202) 1222,1221 v1(1222,1340)
ENET_MDIO: R30.2 U1.C7 U11.11 | length 1369.2
  Top Layer w5: v1(805,1428) 815,1418 815,1381 822,1374 1127,1374 1157,1404 1213,1404 1237,1380 v1(1237,1325) ; v1(1218,1187) 1218,1155 1270,1103 1270,907.28 U1.C7@1257.54,894.82
  Top Layer w8: R30.2@760,1689 760,1687 798,1649 v1(798,1645) 805.47,1637.53 U11.11@831.5,1637.53
  Bottom Layer w5: v1(798,1645) 792,1639 792,1570 756,1534 756,1517 805,1468 v1(805,1428) ; v1(1218,1187) 1218,1199 1233,1214 1233,1321 v1(1237,1325)
ENET_RX+: JK9.11 U11.5 | length 341.3
  Top Layer w10: JK9.11@719.88,1929.13 733,1916.02 733,1862 825,1770 882,1770 916.16,1735.85 U11.5@916.16,1702.5
ENET_RX-: JK9.12 U11.4 | length 343
  Top Layer w10: JK9.12@769.88,1929.13 752,1911.25 752,1871 834,1789 890,1789 935.84,1743.15 U11.4@935.84,1702.5
ENET_RXD0: R16.2 U1.E12 U11.16 | length 1366.7
  Top Layer w5: U1.E12@1385.5,843.64 v1(1398.29,856.43)
  Top Layer w8: R16.2@760,1485 787,1485 v2(815,1513) 815,1522.59 U11.16@831.5,1539.09
  Bottom Layer w5: v2(815,1513) 823,1521 1131,1521 1137,1515 1214,1515 1224,1505 1259,1505 1273,1491 1273,1422 1259,1408 1259,1388 1266,1381 1295,1381 1442,1234 1442,996 1466,972 1466,945 1442,921 1442,893 1405.43,856.43 v1(1398.29,856.43)
ENET_RXD1: R17.2 U1.D12 U11.15 | length 1408.4
  Top Layer w5: v2(1234,1525) 1264,1495 1302,1495 1362,1435 1362,1214 1436,1140 1436,1112 1456,1092 1456,1002 1479,979 1479,933 1454,908 1431,908 1424,901 1424,888.73 1417.69,882.41 1398.68,882.41 U1.D12@1385.5,869.23
  Top Layer w8: R17.2@760.09,1525.68 v2(775.68,1525.68) 781.68,1525.68 814.78,1558.77 U11.15@831.5,1558.77
  Bottom Layer w5: v2(775.68,1525.68) 782,1532 1115,1532 1135,1552 1160,1552 1187,1525 v2(1234,1525)
ENET_RXEN: R18.2 U1.C12 U11.18 | length 1303.7
  Top Layer w4: v1(990,1456) 993,1453 1012,1453 1020,1445 1020,1411 1047,1384 1122,1384 1153,1415 1217,1415 1221,1411 1282,1411 1288,1405 1288,1331 v1(1283,1326)
  Top Layer w5: U1.C12@1385.5,894.82 v1(1398.29,907.61)
  Top Layer w8: R18.2@876.78,1433.77 U11.18@876.78,1513.5
  Bottom Layer w4: v1(1283,1326) 1291,1326 1398.29,1218.71 v1(1398.29,907.61)
  Bottom Layer w5: v2(877,1451) 855,1429 855,1417 867,1405 882,1405 895,1392 911,1392 928,1409 946,1409 963,1392 992,1392 1016,1416 1016,1430 v1(990,1456)
ENET_RXER: R19.2 U1.C13 U11.20 | length 1274.2
  Top Layer w5: v1(1149,1488) 1151,1486 1175,1486 1183,1494 1183,1514 1189,1520 1197,1520 1204,1513 1204,1499 1215.5,1487.5 1239.5,1487.5 1255,1472 1294,1472 1340,1426 1340,1205 1415,1130 1415,1103 1436,1082 1436,989 1458,967 1458,949.78 1441.82,933.59 1428.95,933.59 1424.27,928.91 1424.27,915.27 1411.09,902.09 U1.C13@1411.09,894.82
  Top Layer w8: R19.2@916.16,1433.85 U11.20@916.16,1513.5
  Bottom Layer w5: v2(916,1450) 935,1431 966,1431 976,1441 976,1456 968,1464 968,1483 984,1499 1061,1499 1077,1483 1093,1483 1109,1499 1122,1499 1129,1492 1145,1492 v1(1149,1488)
ENET_TX+: JK9.9 U11.7 | length 388.7
  Top Layer w10: JK9.9@619.88,1929.13 634,1915.02 634,1869 744,1759 774,1759 800,1733 865,1733 876.78,1721.22 U11.7@876.78,1702.5
ENET_TX-: JK9.10 U11.6 | length 388.5
  Top Layer w10: JK9.10@669.88,1929.13 655,1914.25 655,1876 752,1779 780,1779 807,1752 874,1752 896.46,1729.53 U11.6@896.46,1702.5
ENET_TX_CLK: U1.B13 U11.9 | length 1310
  Top Layer w5: v1(1288,1457) 1294,1457 1329,1422 1329,1200 1404,1125 1404,1099 1424,1079 1424,941.37 1411.09,928.46 U1.B13@1411.09,920.41
  Top Layer w8: v2(809,1698) 830.09,1676.91 U11.9@831.5,1676.91
  Bottom Layer w5: v2(809,1698) 809,1730 817,1738 839,1738 874,1703 874,1664 884,1654 922,1654 952,1624 995,1624 1032,1587 1092,1587 1112,1567 1162,1567 1186,1543 1242,1543 1288,1497 v1(1288,1457)
ENET_TXD0: U1.B12 U11.24 | length 1232.5
  Top Layer w5: v1(1058,1472) 1076,1472 1083,1465 1083,1410 1089,1404 1096,1404 1101,1409 1101,1471 1108,1478 1116,1478 1122,1472 1122,1436 1127,1431 1136,1431 1141,1436 1141,1456 1147,1462 1156,1462 1162,1456 1162,1440 1166,1436 1175,1436 1180,1441 1180,1458 1186,1464 1193,1464 1198,1459 1198,1441 1203,1436 1214,1436 1218,1440 1218,1460 1222,1464 1232,1464 1237,1459 1237,1437 1243,1431 1290,1431 1308,1413 1308,1191 1383,1116 1383,1090 1398,1075 1398,932.91 U1.B12@1385.5,920.41
  Top Layer w8: U11.24@994.92,1513.5 994.92,1493.09 1004,1484 v1(1004,1469)
  Bottom Layer w5: v1(1004,1469) 1004,1463 1024,1443 1038,1443 1058,1463 v1(1058,1472)
ENET_TXD1: U1.A12 U11.25 | length 1177.8
  Top Layer w5: 1020.5,1475.5 1020.5,1458.5 1029,1450 1029,1415 1035,1409 1042,1409 1047,1414 1047,1449 1054,1456 1064,1456 1071,1449 1071,1399 1077,1393 1102,1393 1113,1404 1113,1413 1121,1421 1145,1421 1149,1425 1221,1425 1225,1421 1285,1421 1297,1409 1297,1186 1372,1111 1372,1100 cw(c1364,1100) 1364,1092 1355,1092 ccw(c1355,1084) 1355,1076 1375,1076 cw(c1375,1068) 1375,1060 1355,1060 ccw(c1355,1052) 1355,1044 1375,1044 cw(c1375,1036) 1375,1028 1355,1028 ccw(c1355,1020) 1355,1012 1375,1012 cw(c1375,1004) 1381.15,1009.12 1385.5,1004.77 U1.A12@1385.5,946
  Top Layer w8: 1020.5,1475.5 U11.25@1020.5,1539.09
ENET_TXEN: U1.A13 U11.23 | length 1225.8
  Top Layer w5: v1(1039,1485) 1039,1526 cw(c1047,1526) 1055,1526 1055,1494 ccw(c1063,1494) 1071,1494 1071,1509 cw(c1079,1509) 1087,1509 1087,1493 ccw(c1095,1493) 1103,1493 1103,1510 cw(c1111,1510) 1114.14,1517.36 1114.5,1517 1143,1517 cw(c1143,1509) 1143,1501 1135,1501 1128,1494 1128,1486 1141,1473 1179,1473 1193,1487 1201,1487 1211,1477 1234,1477 1250,1461 1250,1449 1258,1441 1294,1441 1319,1416 1319,1195 1393,1121 1393,1094 1411.09,1075.91 U1.A13@1411.09,946
  Top Layer w8: U11.23@975.22,1513.5 975.22,1483.77 v1(984,1475)
  Bottom Layer w5: v1(984,1475) 984,1484 989,1489 1015,1489 1020,1484 1020,1462 1027,1455 1033,1455 1039,1461 v1(1039,1485)
GND: C1.2 C2.2 C3.2 C4.2 C5.1 C6.1 C7.2 C8.2 C9.1 C10.1 C12.2 C13.2 C14.2 C15.2 C16.2 C17.1 C18.1 C19.1 C20.1 C21.2 C22.2 C23.2 C24.1 C25.1 C26.1 C28.2 C29.2 C30.1 C31.2 C32.1 C33.1 C34.1 C35.1 C36.1 C37.2 C38.1 C39.2 C40.1 C41.2 C45.2 C46.2 C47.2 C48.2 C49.2 C50.2 C51.1 C52.1 C53.2 C54.2 C55.2 C56.2 C57.2 C58.1 C59.1 C60.1 C61.2 C62.1 C63.1 C64.1 C65.1 C66.1 C67.1 C68.1 C69.1 C70.1 C71.2 C72.1 C73.2 C74.2 C75.1 C76.1 C77.1 C78.1 C79.2 C80.1 C81.1 C82.1 C83.1 C84.1 C85.1 C86.2 C87.2 JK1.0 JK1.5 JK2.0 JK2.5 JK3.3 JK4.4 JK6.0 JK6.6 JK7.0 JK8.12 JK9.8 JK9.15 JK9.16 JK10.13 JK11.5 JK11.12 JK11.18 JK11.19 JK11.20 JK11.27 JK11.28 JK11.34 JK11.35 JK11.36 JK11.38 JK11.@1174.28,1363.74 K1.1 K1.3 K2.1 K2.3 K3.1 K3.3 K4.1 K4.3 LED1.2 LED2.2 pad.@1870.08,98.43 Q1.2 R8.2 R11.1 R15.1 R16.1 R17.1 R18.1 R20.2 R21.2 R23.1 R24.2 R26.1 R29.1 R33.2 R34.2 R37.2 R38.2 R39.2 R40.2 R41.1 R42.1 R43.1 R44.1 R45.1 R46.1 R47.1 R48.1 R49.1 R50.1 R51.1 R52.1 R57.2 R59.2 U1.A1 U1.A14 U1.B5 U1.B10 U1.E2 U1.E13 U1.G7 U1.G8 U1.H7 U1.H8 U1.J7 U1.J8 U1.K2 U1.K6 U1.K9 U1.K13 U1.L9 U1.N1 U1.N2 U1.N5 U1.N8 U1.P1 U1.P14 U2.A1 U2.A3 U2.B7 U2.C3 U2.D7 U2.E3 U2.J1 U3.0 U3.4 U4.2 U5.0 U5.5 U5.8 U5.11 U5.12 U5.16 U5.20 U5.22 U5.23 U5.24 U5.25 U5.26 U5.27 U5.30 U6.1 U6.2 U7.2 U7.3 U8.2 U8.4 U9.G2 U9.G3 U9.G4 U9.G5 U9.G6 U9.G7 U9.G8 U9.G9 U9.H2 U9.H9 U9.L3 U9.L8 U9.M4 U9.M7 U9.P2 U9.P9 U10.2 U10.3 U11.0 U11.1 U12.2 U13.2 U14.2 U15.2 U16.2 | length 13027.8
  Top Layer w5: 1347.11,933.2 1347.11,954 ; U1.E13@1411.09,843.64 1424.27,856.82 1458.82,856.82 v1(1460,858) ; 1424.27,728.87 v1@1450,728.87
  Top Layer w10: U2.J1@666.02,1061.98 v3(666,1081) ; v3(779.2,1011.79) U2.E3@792,998.99 ; U2.D7@823.5,873.01 v3(834.5,862) ; U2.C3@854.99,998.99 v3(867.79,986.2) ; U2.B7@886.49,873.01 v3(899.28,860.21) ; U2.A3@917.98,998.99 v3(930.78,986.2) ; U2.A1@917.98,1061.98 v3(930.78,1049.19) ; U11.0@982,1645 982,1672 994.92,1684.92 U11.1@994.92,1702.5 ; v3(1093,957) U1.A1@1104,946 ; U1.P1@1104,613.32 v1(1113.34,622.67) ; U1.N1@1104,638.91 1113.34,629.57 v1(1113.34,622.67) ; v1(1113,1178) 1124,1167 R45.1@1181,1167 ; v1(1116.8,702.89) U1.K2@1129.59,715.68 ; v1(1116.8,830.84) U1.E2@1129.59,843.64 ; U1.N2@1129.59,638.91 v1(1113.34,622.67) ; v3(1193.57,933.2) U1.B5@1206.36,920.41 ; U1.N5@1206.36,638.91 v1(1215.7,629.57) ; U1.K6@1231.95,715.68 v3(1244.75,728.48) U1.J7@1257.54,741.28 ; U1.H7@1257.54,766.87 v3(1270.34,779.66) ; U1.G7@1257.54,792.46 v3(1270.34,779.66) ; U1.N8@1283.13,638.91 v1(1295.93,626.12) ; U1.J8@1283.13,741.28 v3(1295.93,728.48) U1.K9@1308.72,715.68 U1.L9@1308.72,690.09 ; U1.H8@1283.13,766.87 v3(1270.34,779.66) ; U1.G8@1283.13,792.46 v3(1270.34,779.66) ; U1.B10@1334.32,920.41 1347.11,933.2 ; v1(1345,965) 1345.32,964.68 1345.32,956.08 ; U1.K13@1411.09,715.68 1424.27,728.87 ; U1.A14@1436.68,946 1443,952.32 v1(1443,958) ; v1@1449,729 v1(1456,729) ; U5.30@1558.66,1456.47 1623.62,1456.47 v6(1653.16,1486) ; U5.27@1558.66,1515.53 U5.0@1623.62,1515.53 ; U5.26@1558.66,1535.22 U5.0@1597.16,1535.22 ; U5.25@1558.66,1554.91 1577.46,1554.91 U5.0@1597.16,1535.22 ; U5.24@1584.24,1580.5 1584.24,1560.91 U5.0@1603.93,1541.22 ; U5.23@1603.93,1580.5 U5.0@1603.93,1541.22 ; U5.22@1623.62,1580.5 U5.0@1623.62,1515.53 ; U5.5@1663,1391.5 1663,1469.15 1722.07,1410.09 U5.8@1722.07,1391.5 ; U5.20@1663,1580.5 1663,1495.85 v6(1653.16,1486) ; U5.0@1690.16,1542 1718.16,1542 1731.07,1554.91 U5.16@1747.66,1554.91 ; U5.11@1747.66,1456.47 1682.69,1456.47 U5.0@1663,1476.15 ; U5.12@1747.66,1476.15 U5.0@1663,1476.15 ; U5.0@1597.16,1535.22 U5.0@1603.93,1535.22 ; U5.0@1603.93,1535.22 U5.0@1603.93,1541.22 ; U5.0@1603.93,1535.22 U5.0@1623.62,1515.53 ; U5.0@1623.62,1515.53 v6(1653.16,1486) ; v6(1653.16,1486) U5.0@1663,1476.15
  Top Layer w14: v4(533,1567) v4@533.07,1566.93 ; v1@558,663.09 v1@590,631.09 ; v1(558,664) 557,665 v1(557,733) v1(557,812) 557,827 567,837 v1(567,1085) ; v1(590,631) 623,598 ; 627,598 v1(681,598) v1(729,598) 902,598 1054,750 ; v1(857,510) 869,498 909,498 919,508 v1(919,533) 930,533 v1(968,571) ; v1(1010,613) v1(1051,654)
  Top Layer w15: U9.P2@154.37,511.81 v1(174.05,531.5) ; U9.H2@154.37,748.03 v1(174.05,767.72) ; U9.G2@154.37,787.4 v1(174.05,767.72) ; U9.L3@193.74,629.92 v1(213.43,610.24) ; U9.G3@193.74,787.4 v1(174.05,767.72) ; U9.M4@233.11,590.55 v1(252.8,610.24) ; U9.G4@233.11,787.4 v1(252.8,767.72) U9.G5@272.48,787.4 ; U9.G6@311.85,787.4 v1(331.53,767.72) U9.G7@351.22,787.4 ; v1(331.53,610.24) U9.M7@351.22,590.55 ; v1(370.91,610.24) U9.L8@390.59,629.92 ; U9.G8@390.59,787.4 v1(410.28,767.72) ; v1(410.28,531.5) U9.P9@429.96,511.81 ; U9.H9@429.96,748.03 v1(410.28,767.72) ; U9.G9@429.96,787.4 v1(410.28,767.72) ; v1(471,944) 471,625 v1(588,508) ; JK9.8@569.88,1929.13 569.88,1902.12 696,1776 696,1754 R29.1@720,1730 ; v1@588,506 v1(588,508) ; v1(695,1904) v1(695,1869) v1(763,1801) ; v1(781,508) v1(588,508) ; v2(800.5,183.5) K2.1@826.74,183.5 ; v2(907,176) R37.2@922,176 ; R26.1@999,1393 v1(1015,1393) ; v1(1012,533) v1(1077.5,598.5) ; C34.1@1109,548 v1@1122.5,534.5 ; K3.1@1355.5,1529.26 1331,1553.76 1331,1674.09 v4(1333.33,1676.43) 1343.65,1686.74 K3.3@1355.5,1686.74 ; R15.1@1433,1246 1433,1293.44 LED1.2@1434,1294.44 ; U1.P14@1436.68,613.32 1444,606 v1(1444,603) ; C13.2@1501,628 1503,628 v1(1532,657)
  Top Layer w18: v2(705,1607) R23.1@720,1607 ; R16.1@720,1485 720,1525.6 R17.1@720.09,1525.68 ; C51.1@944,1826 C52.1@985,1826 C55.2@1026,1826 C53.2@1067,1826 ; R24.2@1132,1575 R21.2@1132,1616 R20.2@1132,1657 C50.2@1132,1698 ; C21.2@1375,1818 U8.2@1439,1818 ; U8.4@1539,1781 1549,1781 v4(1586,1818) C41.2@1604,1818 ; U6.2@1603.82,1212.68 1629.68,1212.68 v2(1649,1232) 1628.94,1252.06 U6.1@1603.82,1252.06 ; C45.2@1636,1086 v2(1636,1103) ; C2.2@1730,739 C1.2@1730,780
  Top Layer w20: v2(153,1670) 153,1737.65 JK6.0@157.48,1742.13 201.44,1786.09 LED2.2@201.44,1801 ; U3.4@263.52,141 346,141 v8(421,216) ; v4@533.07,1566.93 JK6.6@574.8,1566.93 ; v1@588,506 588,465 576.5,453.5 576.5,453.17 574,450.67 574,356 v2(601,329) ; v1(619,1153) 637,1171 R48.1@637,1179 ; R8.2@645,436 670,411 828.5,411 C24.1@832,407.5 ; R47.1@708,1315 712.53,1315 v2(721.53,1324) ; v1(722,1430) R50.1@737,1430 ; v2(800.5,183.5) K2.1@826.74,183.5 ; C54.2@835,1393 R18.1@876,1393 ; U14.2@961,242 v4(961,271) ; C34.1@1109,548 v1(1121,536) 1122.5,534.5 C5.1@1122.5,494 ; JK2.5@1203,179 1234,179 1245.28,167.72 JK2.0@1245.28,157.48 1217.8,130 JK2.5@1204,130 ; v2(1375,410) 1380,415 1470,415 ; C15.2@1444,538 v2(1460,538) 1542,538 1669,665 1804,665 1823,684 1822.56,684.44 R38.2@1822.56,697 ; v2(1446,1648) 1457,1637 C58.1@1461,1637 C57.2@1502,1637 ; C29.2@1461.16,1436 C39.2@1461.16,1477 C30.1@1461.16,1518 ; U12.2@1470,364 1470,415 ; R34.2@1556,386 1527,415 1470,415 ; C31.2@1602.16,1676 C40.1@1643.16,1676 ; U13.2@1643,364 1643,397 1659,413 1702,413 v4(1715.5,399.5) R33.2@1729,386 ; JK1.5@1668,157.48 JK1.0@1709.84,157.48 ; C4.2@1692,586 v2(1692,606.5) C3.2@1692,627 ; C47.2@1746.16,1676 C28.2@1787.16,1676 ; K4.3@1778.26,426.5 1794.5,426.5 v2(1823,398) ; K4.1@1935.74,426.5 v2(1935.74,444.74)
  Top Layer w30: v4(28,320) 28.26,319.74 K1.3@28.26,298.5 ; v4(43,393) 137.5,298.5 K1.1@185.74,298.5 ; v4(642,200) 658.5,183.5 K2.3@669.26,183.5 ; v4(701.5,283) 701.5,295.5 732,326 U4.2@732,361 732,410 ; U10.3@1180,430 1182,430 1255,503 C14.2@1263,503 1269,509 1292,509 C72.1@1300,517 ; JK1.5@1673,134 1686.36,134 JK1.0@1709.84,157.48 1692.32,175 JK1.5@1673,175
  Top Layer w40: v4(1158,409) v4(1180,409) ; U10.2@1180,398 U10.3@1180,422 ; 1213,157.48 JK2.0@1245.28,157.48
  Bottom Layer w6: C64.1@798,938 804,938 817,925 817,901
  Bottom Layer w10: v2(343,1239) 347.51,1243.51 JK11.38@347.51,1285 ; JK11.36@386.88,1285 386.88,1252.12 C38.1@412,1227 412,1241 406.57,1246.43 JK11.35@406.57,1285 ; C38.1@414,1236 426.25,1248.25 JK11.34@426.25,1285 ; JK11.28@544.36,1259.64 v2(554,1250) ; R42.1@545,1227 545,1241 v2(554,1250) ; JK11.27@564.05,1285 564.05,1260.05 v2(554,1250) ; JK11.20@701.84,1285 701.84,1319.84 706,1324 v2(721.53,1324) ; 721.53,1234.47 JK11.19@721.53,1285 v2(721.53,1324) ; R44.1@723,1201 755,1201 R41.1@776,1201 ; JK11.18@741.21,1285 741.21,1318.79 736,1324 v2(721.53,1324) ; 817,901 825,893 825,871.5 v3(834.5,862) ; JK11.12@859.32,1285 859.32,1318.68 851,1327 724.53,1327 v2(721.53,1324) ; v3(899.28,860.21) 901,861.93 C67.1@901,874 ; v5(1002,1327) 997.12,1322.12 JK11.5@997.12,1285 997.12,1247.88 1018,1227 R46.1@1053,1227 ; v3@1006,849 v3(1009,852) ; v4(1174.28,1363.74) 1174.28,1333.72 1207,1301 1207,1239 R43.1@1195,1227 ; C7.2@1222,703 1222,705.73 v3(1244.75,728.48) ; v3(1295.93,728.48) 1298.48,728.48 1320,750 C35.1@1325,750 ; R57.2@1610,1525 1610,1661.76 JK7.0@1624.67,1676.43 ; v4(1715.5,399.5) 1715.5,365.5 C12.2@1736,345 ; R40.2@1839,787 R39.2@1839,746 1887.07,746 JK4.4@1909.45,723.62
  Bottom Layer w14: v1@558,663 v1(590,631) 623,598 v1(681,598) v1(729,598) 756,571 v1(968,571) v1(1010,613) v1(1051,654) ; v1(857,510) 869,498 909,498 v1(914,503) 919,508 v1@919,529
  Bottom Layer w15: C79.2@174,518 174.05,518.06 v1(174.05,531.5) ; C77.1@174,740 C73.2@174,787 ; C49.2@192.95,926 C48.2@233.95,926 ; v1(213.43,610.24) 213.43,623.43 C81.1@214,624 ; v1(252.8,610.24) 266.76,610.24 C83.1@267,610 ; v1(252.8,767.72) 253,767.92 C74.2@253,788 ; C84.1@318,610 318.24,610.24 v1(331.53,610.24) ; v1(331.53,767.72) C75.1@331.53,786.53 ; C82.1@370,624 370.91,623.1 v1(370.91,610.24) ; v1(410.28,531.5) 410.28,517.72 C80.1@411,517 ; C78.1@411,740 410.28,740.72 v1(410.28,767.72) 410.28,786.27 C76.1@411,787 ; v3(1244.75,728.48) 1258.48,728.48 C32.1@1273,743 ; 1270.34,740.34 v3(1270.34,779.66) 1270.34,785.34 C33.1@1278,793 ; C32.1@1273,750 v3@1273,782.32 ; 1272,806 1272,799 C33.1@1278,793 ; 1272,806 C9.1@1272,834 1271,833 1271,807 1272,806 ; 1272,806 1278,800 C33.1@1278,793
  Bottom Layer w18: C19.1@1345,577 1356,566 C20.1@1386,566 1388,566 1422,600 ; C70.1@1427,613 1437,603 v1(1444,603) C70.1@1434,613 ; C10.1@1453,718 C10.1@1453,726 ; C17.1@1645,603 1688.5,603 v2(1692,606.5) ; C18.1@1647,690 C16.2@1647,731
  Bottom Layer w20: C85.1@45.5,1451 v2(65,1451) ; v2(153,1670) 167.5,1670 C69.1@186.5,1651 ; U15.2@348,1763 348,1733 v2(367,1714) R11.1@434,1714 ; C38.1@412,1227 v2(412,1206.5) C37.2@412,1186 412,1176 429,1159 R52.1@459,1159 ; C22.2@481,1457 v2(502,1457) ; C23.2@522,1537 522,1556 v4(533,1567) ; R59.2@553,905 558,900 U16.2@558,841 558,813 v1(557,812) ; C56.2@589,315 v2@601,327 ; v2(601,329) 792,329 801,320 v2(801,311) ; v1(619,1153) 625,1147 R51.1@636,1147 ; v3(633,857) 640,850 C68.1@647,850 ; v4(701.5,283) 701.5,326.5 ; R44.1@723,1201 v2(723,1218) 723,1233 ; C63.1@771,1025 771,1019.99 v3(779.2,1011.79) ; C62.1@858,972 858,976.41 v3(867.79,986.2) ; v1@920.5,530.5 990.5,530.5 ; C66.1@1001,808 1001,844 v3@1006,849 ; v1@1078,598.5 1058.5,598.5 990.5,530.5 ; C71.2@1358,429 1358,419.99 v2@1361.5,416.5 ; C60.1@1412,416.5 v2@1381.5,416.5 ; v2(1460,538) 1470,548 C8.2@1470,558 ; v2(1823,398) 1824,397 Q1.2@1852,397 ; 990.5,530.5 1007.5,530.5 1057,580 1088.5,580 C6.1@1107,598.5 ; C6.1@1107,598.5 1113.34,604.85 1113.34,620.5 1107,614.16 C6.1@1107,598.5 ; v2@1361.5,416.5 v2(1355,410) v2(1375,410) v2@1381.5,416.5 ; v2@1361.5,416.5 v2@1381.5,416.5
  Bottom Layer w30: v4(961,271) 961,252.5 C61.2@966,247.5
  Bottom Layer w40: JK1.0@1518.5,157.48 1529.52,168.5 C59.1@1576,168.5
  other v1: 1122,523 471,634 1647,710.5 567,901 213,926 567,993 707,1743 684,1788 645,1827 729,1835 604,1868
  other v2: 1730,764 1433,1277 720,1505.3 1132,1595.5 1132,1636.5 1132,1677.5 964.5,1826 1005.5,1826 1046.5,1826
  other v4: 1102.36,53.15 1196.85,53.15 1566.93,53.15 1661.42,53.15 157.48,1131.89 533.46,1167.32 1461.16,1456 1461.16,1498 1622.66,1676 1766.66,1676 523.62,1742.13 1391,1818
  other v5: 855.5,1393
  other v6: 926,1608
HPL+: C11.2 JK3.1 | length 180
  Top Layer w10: JK3.1@1909.45,1299.21 1901,1290.76 1901,1168 C11.2@1933,1136
HPL-: C43.2 JK3.2 | length 223.6
  Top Layer w10: JK3.2@1909.45,1399.21 1955.5,1353.16 1955.5,1226.5 C43.2@1933,1204
HPR+: C27.2 JK3.5 | length 279
  Top Layer w10: C27.2@1691.5,1736 1691.5,1744.5 1725,1778 1841,1778 1909.45,1709.55 JK3.5@1909.45,1699.21
HPR-: C44.2 JK3.4 | length 186.5
  Top Layer w10: C44.2@1818.5,1736 1839,1736 1861,1714 1861,1647.66 JK3.4@1909.45,1599.21
I2C1_SC: JK7.4 JK9.22 R62.2 U1.J11 U5.9 | length 2070.4
  Top Layer w5: U1.J11@1359.91,741.28 v1(1369.82,751.19) ; v1(1711,857) 1711,867 1755,911 1774,911 1843,980 1843,1057 1800,1100 1800,1206 1780,1226 1780,1310 1744,1346 v1(1744,1392) 1744,1413.43 U5.9@1747.66,1417.09
  Top Layer w10: R62.2@1244,1858 1244,1876 1269.88,1901.88 JK9.22@1269.88,1929.13
  Bottom Layer w4: v1(1369.82,751.19) 1389,732 1409,732 1459,782 1496,782 1550,836 1602,836 1614,848 1651,848 1665,862 1706,862 v1(1711,857)
  Bottom Layer w5: JK9.22@1269.88,1929.13 1299.02,1900 1333,1900 1345,1888 1379,1888 1389,1878 1425,1878 1436,1867 1467,1867 1488.84,1845.16 JK7.4@1488.84,1578 1488.84,1555.16 1513,1531 1532,1512 1532,1461 1568,1425 1719,1425 1744,1400 v1(1744,1392)
I2C1_SD: JK7.5 JK9.23 R63.2 U1.K11 U5.10 | length 2149.8
  Top Layer w5: v1(1347.11,728.48) U1.K11@1359.91,715.68 ; v1(1693,835) 1697,839 1715,839 1725,849 1725,866 1759,900 1779,900 1854,975 1854,1062 1811,1105 1811,1211 1791,1231 1791,1314 1755,1350 1755,1375 v1(1764,1384) 1773,1393 1773,1426 1762.22,1436.77 U5.10@1747.66,1436.77
  Top Layer w10: R63.2@1285,1858 1285,1877 1319.88,1911.88 JK9.23@1319.88,1929.13
  Bottom Layer w4: v1(1347.11,728.48) 1361.59,714 1418,714 1468,764 1504,764 1559,819 1610,819 1621,830 1659,830 1673,844 1684,844 v1(1693,835)
  Bottom Layer w5: JK9.23@1319.88,1929.13 1350.02,1899 1384,1899 1394,1889 1429,1889 1440,1878 1476,1878 1508.53,1845.47 JK7.5@1508.53,1578 1508.53,1551.47 1518,1542 1542,1518 1542,1467 1573,1436 1723,1436 1729,1430 1764,1395 v1(1764,1384)